# Altium PCB 4CH_Scanner_Board.PcbDoc
Units mm, origin at the board's own origin, x right, y up, seen from the top; angles counter-clockwise.
Board outline 160 x 100 mm, 4 copper layers (Top Layer, Inner Layer 1, Inner Layer 2, Bottom Layer), stack 1.654 mm thick; 74 components, 88 nets, 358 pads, 1659 vias.
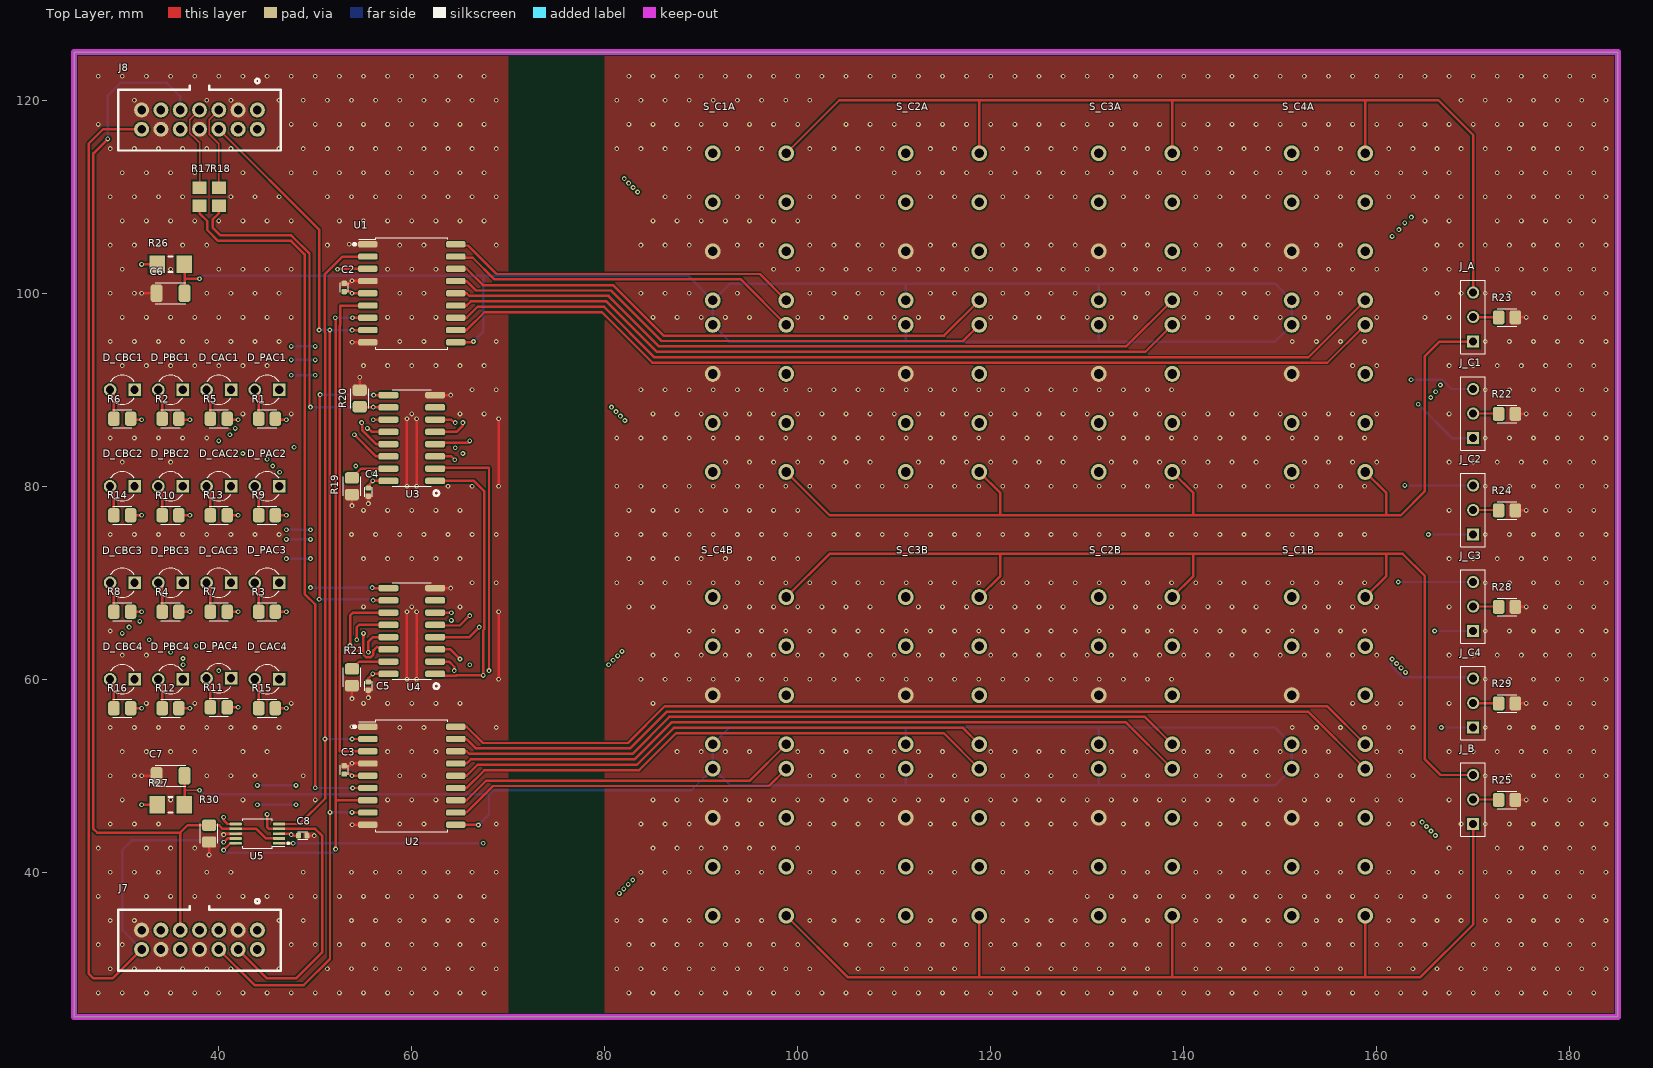
[diagram p0: Top Layer view]
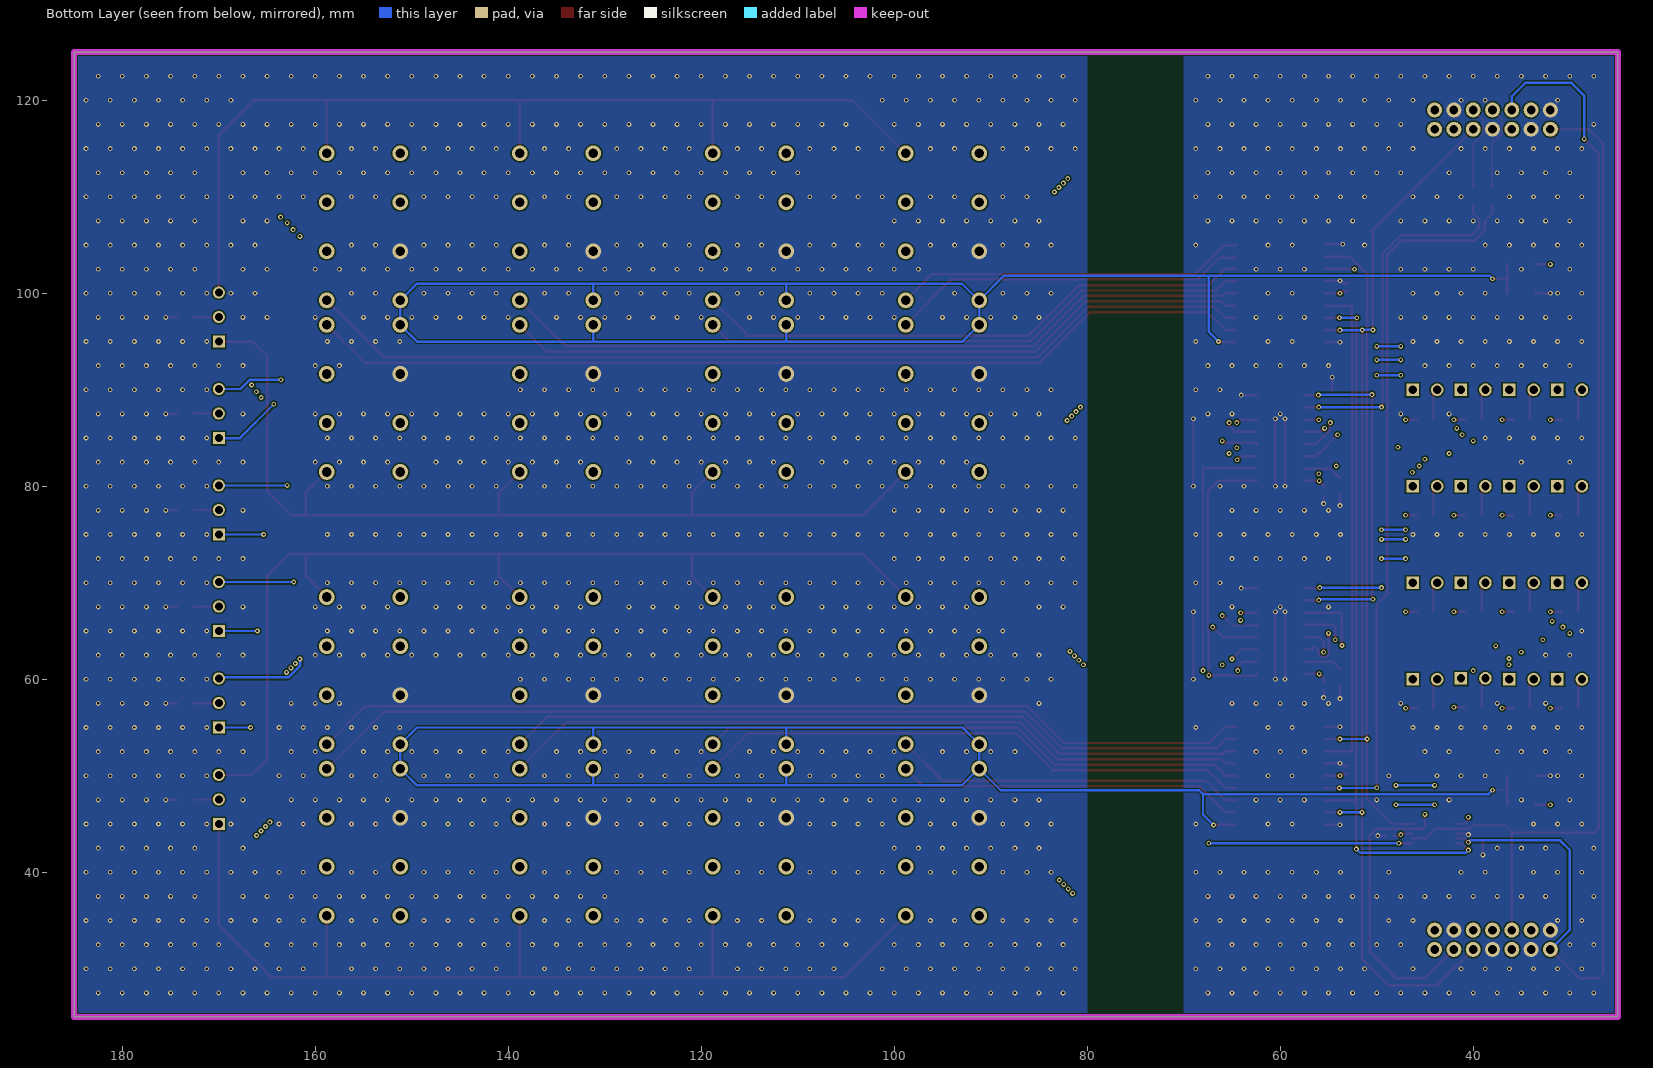
[diagram p1: Bottom Layer view, seen from below]
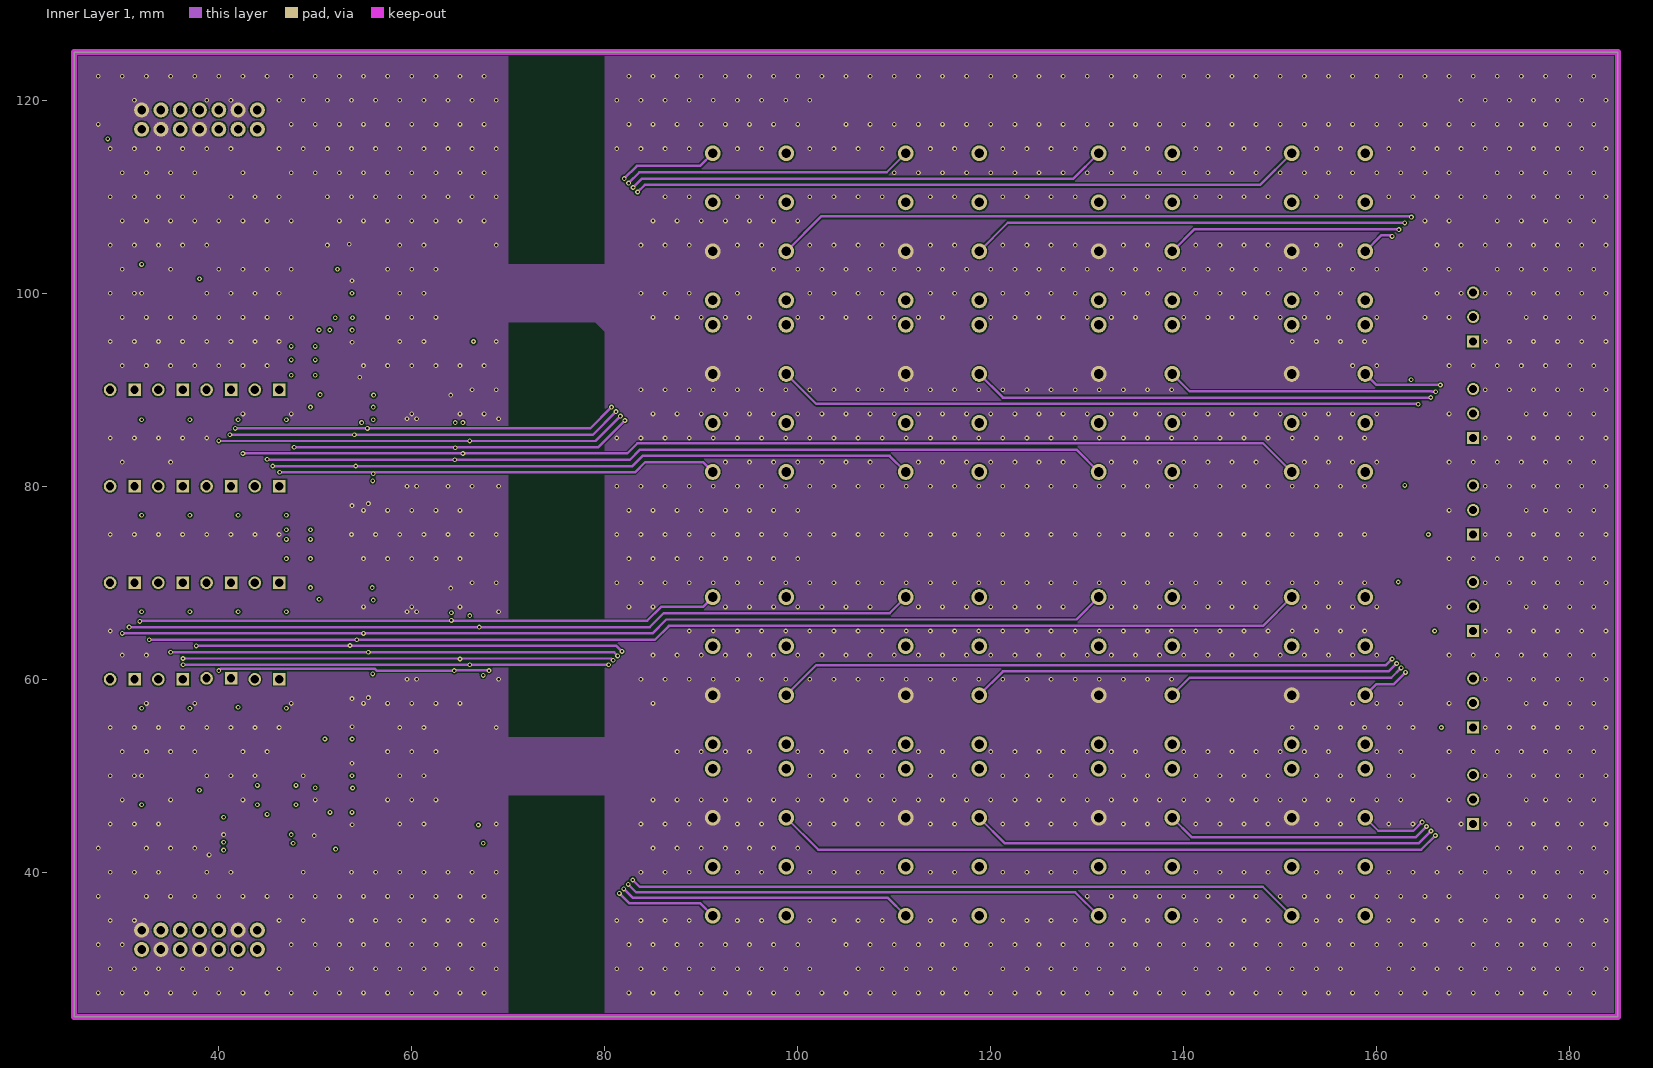
[diagram p2: Inner Layer 1]
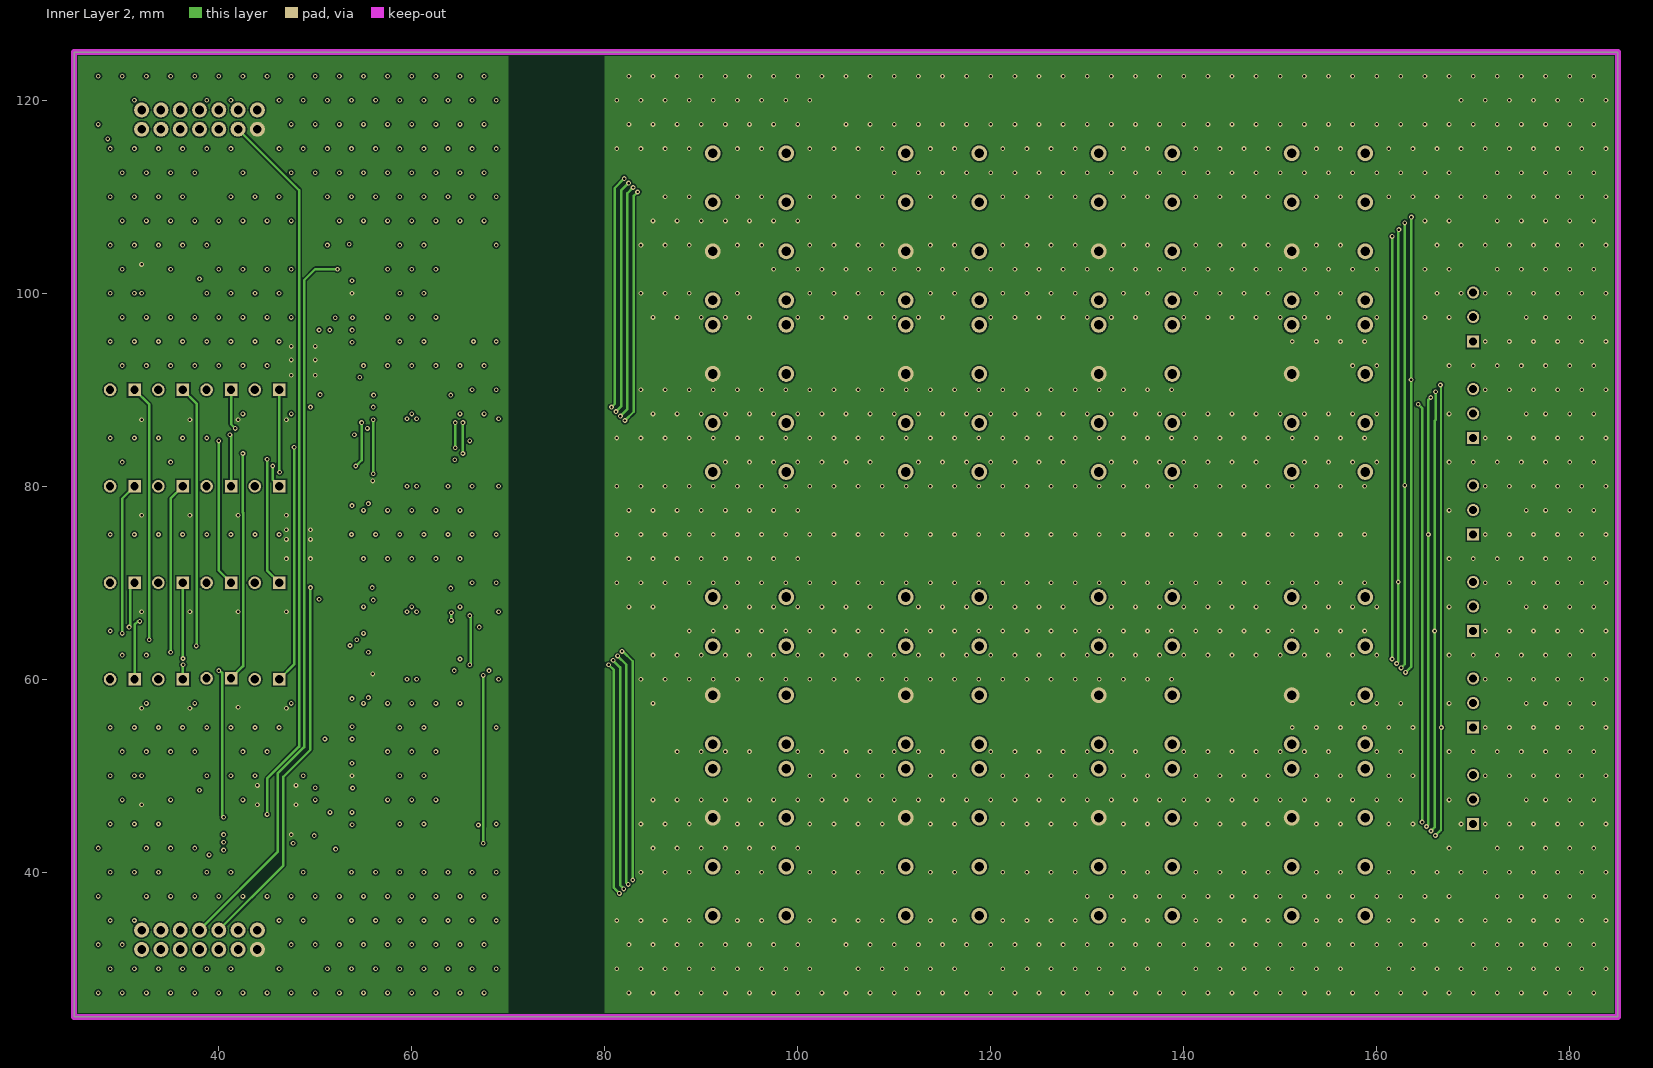
[diagram p3: Inner Layer 2]
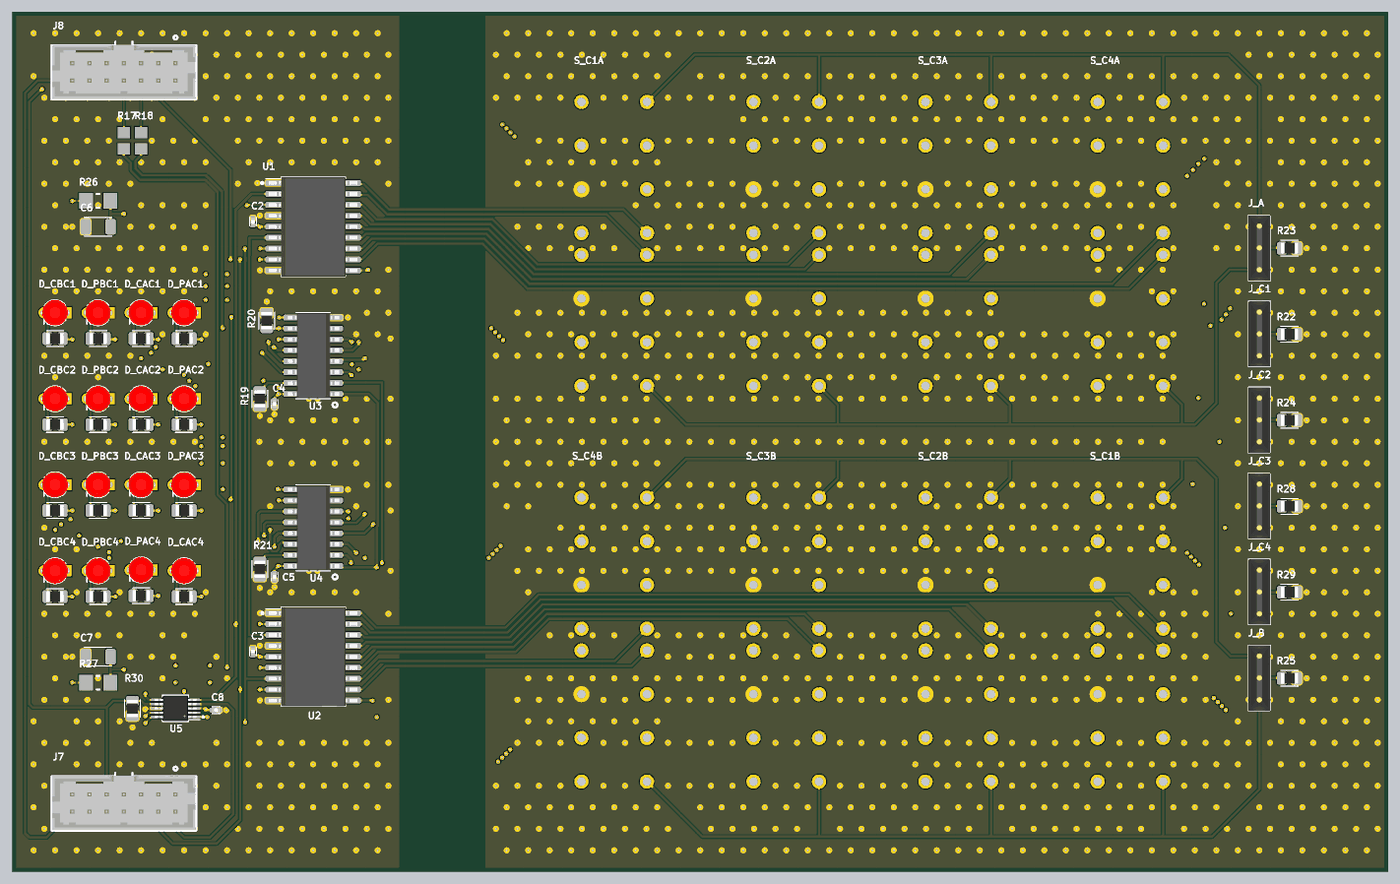
[diagram p4: 3D render of the assembled board from above, using the file's embedded part models]

## Layer stack, top to bottom
Top Solder: solder mask 0.0102, Solder Resist, Dk 3.5
Top Layer: signal copper 0.042
Dielectric 1: prepreg 0.2, FR-4, Dk 4.2
Inner Layer 1: signal copper 0.035
Dielectric 2: core 1.1, FR-4, Dk 4.2
Inner Layer 2: signal copper 0.035
Dielectric 3: prepreg 0.2, FR-4, Dk 4.2
Bottom Layer: signal copper 0.042
Bottom Solder: solder mask 0.0102, Solder Resist, Dk 3.5

## Board outline
25,25 185,25 185,125 25,125

## Design rules (kind name [scope] priority, off if disabled: settings)
Clearance [All] p1: gap=0.15
MinimumSolderMaskSliver [All] p1: minsoldermaskwidth=0.1
PlaneClearance [All] p1: clearance=0.3
PlaneConnect PlaneConnect_1 [All] p1: planeconnectstyle=Relief reliefexpansion=0.508 reliefentries=4 reliefconductorwidth=0.254 reliefairgap=0.254
PolygonConnect PolygonConnect_1 [All] p1: connectstyle=Direct reliefconductorwidth=0.254 reliefentries=4 polygonreliefangle="90 Angle" airgapwidth=0.254
RoutingVias [All] p1: holewidth=0.25 width=0.5 viastyle="Through Hole" minholewidth=0.2 minwidth=0.4 maxholewidth=1 maxwidth=1.27
SilkToSolderMaskClearance [IsPad] p1: minsilkscreentomaskgap=0.1 clearancetoexposedcopper=TRUE
SolderMaskExpansion [All] p1: expansion=0.102
Width [All] p1: maxlimit=2 minlimit=0.15 preferedwidth=0.254
26 further rules are at their usual default settings.

## Components (designator, comment, footprint, x,y, rotation, side; value= is the part's Value field where it differs from the comment)
C2 "0.1µF" CAPC1005X55L25N 53,100.6 r90 top
C3 "0.1µF" CAPC1005X55L25N 53,50.6 r90 top
C4 "0.1µF" CAPC1005X55L25N 55.5,79.4 r270 top
C5 "0.1µF" CAPC1005X55L25N 55.5,59.3 r270 top
C6 "10µF" CAPC3216X160L55N 35,100 r180 top
C7 "10µF" CAPC3216X160L55N 35,50 r180 top
C8 "0.1µF" CAPC1005X55L25N 48.7,43.8 r0 top
D_CAC1 "Red LED" LEDRD100W25D118H196 40,90 r180 top
D_CAC2 "Red LED" LEDRD100W25D118H196 40,80 r180 top
D_CAC3 "Red LED" LEDRD100W25D118H196 40,70 r180 top
D_CAC4 "Red LED" LEDRD100W25D118H196 45,60 r180 top
D_CBC1 "Red LED" LEDRD100W25D118H196 30,90 r180 top
D_CBC2 "Red LED" LEDRD100W25D118H196 30,80 r180 top
D_CBC3 "Red LED" LEDRD100W25D118H196 30,70 r180 top
D_CBC4 "Red LED" LEDRD100W25D118H196 30,60 r180 top
D_PAC1 "Red LED" LEDRD100W25D118H196 45,90 r180 top
D_PAC2 "Red LED" LEDRD100W25D118H196 45,80 r180 top
D_PAC3 "Red LED" LEDRD100W25D118H196 45,70 r180 top
D_PAC4 "Red LED" LEDRD100W25D118H196 40,60.1 r180 top
D_PBC1 "Red LED" LEDRD100W25D118H196 35,90 r180 top
D_PBC2 "Red LED" LEDRD100W25D118H196 35,80 r180 top
D_PBC3 "Red LED" LEDRD100W25D118H196 35,70 r180 top
D_PBC4 "Red LED" LEDRD100W25D118H196 35,60 r180 top
J7 "QUIKEVAL_HEADER" 0878311420 38,33 r0 top
J8 "QUIKEVAL_HEADER" 0878311420 38,118 r0 top
J_A "1PR 22AWG STP" HDRV3W25P100_3X1_300X100H500 170,95 r90 top
J_B "1PR 22AWG STP" HDRV3W25P100_3X1_300X100H500 170,45 r90 top
J_C1 "1PR 22AWG STP" HDRV3W25P100_3X1_300X100H500 170,85 r90 top
J_C2 "1PR 22AWG STP" HDRV3W25P100_3X1_300X100H500 170,75 r90 top
J_C3 "1PR 22AWG STP" HDRV3W25P100_3X1_300X100H500 170,65 r90 top
J_C4 "1PR 22AWG STP" HDRV3W25P100_3X1_300X100H500 170,55 r90 top
R1 "1k" RESC2012X75L55N 45,87 r0 top
R2 "1k" RESC2012X75L55N 35,87 r0 top
R3 "1k" RESC2012X75L55N 45,67 r0 top
R4 "1k" RESC2012X75L55N 35,67 r0 top
R5 "1k" RESC2012X75L55N 40,87 r0 top
R6 "1k" RESC2012X75L55N 30,87 r0 top
R7 "1k" RESC2012X75L55N 40,67 r0 top
R8 "1k" RESC2012X75L55N 30,67 r0 top
R9 "1k" RESC2012X75L55N 45,77 r0 top
R10 "1k" RESC2012X75L55N 35,77 r0 top
R11 "1k" RESC2012X75L55N 40,57.1 r0 top
R12 "1k" RESC2012X75L55N 35,57 r0 top
R13 "1k" RESC2012X75L55N 40,77 r0 top
R14 "1k" RESC2012X75L55N 30,77 r0 top
R15 "1k" RESC2012X75L55N 45,57 r0 top
R16 "1k" RESC2012X75L55N 30,57 r0 top
R17 "Jumper" RESC_2012[0805]_N 38,110 r270 top
R18 "Jumper" RESC_2012[0805]_N 40,110 r270 top
R19 "10k" RESC2012X75L55N 53.8,80 r90 top
R20 "10k" RESC2012X75L55N 54.6,89.1 r270 top
R21 "10k" RESC2012X75L55N 53.8,60.2 r90 top
R22 "0.0" RESC2012X75L55N 173.5,87.5 r0 top
R23 "0.0" RESC2012X75L55N 173.5,97.5 r0 top
R24 "0.0" RESC2012X75L55N 173.5,77.5 r0 top
R25 "0.0" RESC2012X75L55N 173.5,47.5 r0 top
R26 "10k" RESC_3216[1206]_N 35,103 r0 top
R27 "10k" RESC_3216[1206]_N 35,47 r0 top
R28 "0.0" RESC2012X75L55N 173.5,67.5 r0 top
R29 "0.0" RESC2012X75L55N 173.5,57.5 r0 top
R30 "10k" RESC2012X75L55N 39,44 r90 top
S_C1A "4PDT_RELAY_L2" L2_4PDT_RELAY 95,98 r90 top
S_C1B "4PDT_RELAY_L2" L2_4PDT_RELAY 155,52 r90 top
S_C2A "4PDT_RELAY_L2" L2_4PDT_RELAY 115,98 r90 top
S_C2B "4PDT_RELAY_L2" L2_4PDT_RELAY 135,52 r90 top
S_C3A "4PDT_RELAY_L2" L2_4PDT_RELAY 135,98 r90 top
S_C3B "4PDT_RELAY_L2" L2_4PDT_RELAY 115,52 r90 top
S_C4A "4PDT_RELAY_L2" L2_4PDT_RELAY 155,98 r90 top
S_C4B "4PDT_RELAY_L2" L2_4PDT_RELAY 95,52 r90 top
U1 "MIC5842" SOIC18P127_1155X1030X265L83X41N 60,100 r270 top
U2 "MIC5842" SOIC18P127_1155X1030X265L83X41N 60,50 r270 top
U3 "74HC165" SOIC16P127_990X600X175L83X41N 60,85 r90 top
U4 "74HC165" SOIC16P127_990X600X175L83X41N 60,65 r90 top
U5 "FSA2257MUX" SOP50P490X110-10L30N 44,44 r90 top

## Footprints (in the part's own frame and the unit in brackets; to place one, negate y for a bottom-side part, rotate by r counter-clockwise, add the part's x,y. Pads: shape width x height; smd on the part's side, far side on the other; paste and mask are expansions set on the pad)
0878311420 [mm]
  round 1.55 hole 0.9: 1(6,1) 2(6,-1) 3(4,1) 4(4,-1) 5(2,1) 6(2,-1) 7(0,1) 8(0,-1) 9(-2,1) 10(-2,-1) 11(-4,1) 12(-4,-1) 13(-6,1) 14(-6,-1)
  silkscreen extent -8.4,-3.2 8.4,4.22, body extent -8.33,-3.15 8.33,3.15, height 4.9
CAPC1005X55L25N [mm] "Capacitor, Chip; 1.00 mm L X 0.50 mm W X 0.55 mm H body"
  rrect52% 0.54x0.6 smd: 1(-0.43,0) 2(0.43,0)
  silkscreen extent -0.5,-0.4 0.5,0.4, body extent -0.5,-0.26 0.5,0.26, height 0.57
CAPC3216X160L55N [mm] "Capacitor, Chip; 3.20 mm L X 1.60 mm W X 1.60 mm H body"
  rrect41% 1.21x1.82 smd: 1(-1.45,0) 2(1.45,0)
  silkscreen extent -1.6,-1.09 1.6,1.09
HDRV3W25P100_3X1_300X100H500 [mm] "Header, Vertical, 100 mil pitch; 25 mil lead width, 3 pins, 1 row, 3 pins per row, 300 mil L X 100 mil W X 500 mil H body"
  rect 1.25x1.25 hole 0.833 paste-1.25: 1(0,0)
  round 1.25 hole 0.833 paste-1.25: 2(2.54,0) 3(5.08,0)
  silkscreen extent -1.27,-1.27 6.35,1.27, body extent -1.27,-1.27 6.35,1.27, height 12.7
L2_4PDT_RELAY [mil]
  round 65 hole 40: 1(50,150) 2(-50,150) 3(250,150) 4(-250,150) 5(450,150) 6(-450,150) 7(650,150) 8(-650,150) 9(-650,-150) 10(650,-150) 11(-450,-150) 12(450,-150) 13(-250,-150) 14(250,-150) 15(-50,-150)
  round 65 hole 40 paste+0: 16(50,-150)
  body extent -795,-195 795,195, height 390
LEDRD100W25D118H196 [mil] "Radial (LED); 100 mil C X 118.1 mil Dia X 196.9 mil H body"
  round 51.2 hole 34 paste-51.2: A(50,0)
  rect 51.2x51.2 hole 34 paste-51.2: C(-50,0)
  silkscreen extent -49,-59 49,59, body extent -63,-59 63,59, height 197
RESC2012X75L55N [mm] "Resistor, Chip; 2.00 mm L X 1.25 mm W X 0.75 mm H body"
  rrect42% 1.19x1.47 smd: 1(-0.865,0) 2(0.865,0)
  silkscreen extent -1,-0.91 1,0.91, body extent -1,-0.62 1,0.63, height 0.6
RESC_2012[0805]_N [mm] "Resistor EIA 0805"
  rect 1.3x1.45 smd: 1(-0.95,0) 2(0.95,0)
  body extent -1.08,-0.7 1.07,0.7, height 0.65
RESC_3216[1206]_N [mm] "Resistor EIA 1206"
  rect 1.6x1.8 smd: 1(-1.4,0) 2(1.4,0)
  silkscreen extent -0.2,-0.8 0.2,0.8, body extent -1.68,-0.87 1.68,0.87, height 0.71
SOIC16P127_990X600X175L83X41N [mm] "Small Outline IC (SOIC), 1.27 mm pitch; 16 pin, 9.90 mm L X 3.90 mm W X 1.75 mm H body"
  rrect52% 0.66x2.07 smd: 1(-4.445,-2.425) 2(-3.175,-2.425) 3(-1.905,-2.425) 4(-0.635,-2.425) 5(0.635,-2.425) 6(1.905,-2.425) 7(3.175,-2.425) 8(4.445,-2.425) 9(4.445,2.425) 10(3.175,2.425) 11(1.905,2.425) 12(0.635,2.425) 13(-0.635,2.425) 14(-1.905,2.425) 15(-3.175,2.425) 16(-4.445,2.425)
  silkscreen extent -6,-2.82 5,2, body extent -4.95,-3.05 4.95,2.95, height 1.75
SOIC18P127_1155X1030X265L83X41N [mm] "Small Outline IC (SOIC), 1.27 mm pitch; 18 pin, 11.55 mm L X 7.50 mm W X 2.65 mm H body"
  rrect52% 0.66x2 smd: 1(-5.08,-4.555) 2(-3.81,-4.555) 3(-2.54,-4.555) 4(-1.27,-4.555) 5(0,-4.555) 6(1.27,-4.555) 7(2.54,-4.555) 8(3.81,-4.555) 9(5.08,-4.555) 10(5.08,4.555) 11(3.81,4.555) 12(2.54,4.555) 13(1.27,4.555) 14(0,4.555) 15(-1.27,4.555) 16(-2.54,4.555) 17(-3.81,4.555) 18(-5.08,4.555)
  silkscreen extent -5.78,-6.05 5.78,3.75, body extent -5.77,-5.15 5.77,5.15, height 2.65
SOP50P490X110-10L30N [mm] "Small Outline Pkg (SOP), 0.50 mm pitch; 10 pin, 3.00 mm L X 3.00 mm W X 1.10 mm H body"
  rrect50% 0.28x1.27 smd: 1(-1,-2.25) 2(-0.5,-2.25) 3(0,-2.25) 4(0.5,-2.25) 5(1,-2.25) 6(1,2.25) 7(0.5,2.25) 8(0,2.25) 9(-0.5,2.25) 10(-1,2.25)
  silkscreen extent -1.53,-3.3 1.53,1.53, body extent -1.5,-2.45 1.5,2.45, height 1.15

## Part data
C2 C3 C4 C5 C8: library part GRM155R71C104JA88D, "CAP CER 0.1UF 16V X7R 0402"
C6 C7: library part GRM31CR71E106KA12L, "CAP CER 10UF 25V X7R 1206"
D_CAC1 D_CAC2 D_CAC3 D_CAC4 D_CBC1 D_CBC2 D_CBC3 D_CBC4 D_PAC1 D_PAC2 D_PAC3 D_PAC4 D_PBC1 D_PBC2 D_PBC3 D_PBC4: library part SSI-LXH600ID-150, "LED 5MM RED DIFF 6\"LDS PANEL MT"
J7 J8: library part 0878311420, "CONN HEADER 14POS 2MM VERT GOLD"
J_A J_B J_C1 J_C2 J_C3 J_C4: library part CON-STP-22AWG-x3, "SOLDER HOLES FOR 3 22AWG WIRES"
R1 R2 R3 R4 R5 R6 R7 R8 R9 R10 R11 R12 R13 R14 R15 R16: library part ERJ-P06J102V, "RES SMD 1K OHM 5% 1/2W 0805"
R17 R18: library part WSL0805R0500FEA18, "RES SMD 0.05 OHM 1% 1/4W 0805"
R19 R20 R21 R30: library part ERJ-P06J103V, "RES SMD 10K OHM 5% 1/2W 0805"
R22 R23 R24 R25 R28 R29: library part ERJ-6BWFR030V, "RES SMD 0.03 OHM 1% 1/2W 0805"
R26 R27: library part CRCW120610K0JNEA, "RES SMD 10K OHM 5% 1/4W 1206"
S_C1A S_C1B S_C2A S_C2B S_C3A S_C3B S_C4A S_C4B: library part DS4E-ML2-DC5V, "RELAY GENERAL PURPOSE 4PDT 2A 5V"
U1 U2: library part MIC5842YWM, "IC DRVR LATCH 8BIT SER IN 18SOIC"
U3 U4: library part 74HC165D, "IC 8BIT SHIFT REGISTER 16SOIC"
U5: "IC SWITCH DUAL SPDT 10MSOP"

## Via types
v1: diameter 0.5, hole 0.25, Top Layer to Bottom Layer, 1659 vias

## Nets (pads, with @x,y where several pads share a name; then routed paths per layer and width w, separated by ;. In a path a pad name is that pad's centre, name@x,y a point inside that pad or via, vN(x,y) a via of type N, cw(c..) or ccw(c..) an arc to the next point about the centre after c; other vN are vias at no path point)
165_CLK: U3.2 U4.2 U5.6 | length 74.5
  Top Layer w0.254: v1(40.5,45.7) 40.5,45.4 40.9,45 U5.6 ; U4.2 63.869,61.825 64.4,61.294 v1(64.4,60.9) ; U3.2@62.5,81.9 68,81.9 v1(68,60.9)
  Inner Layer 1 w0.254: v1(40,60.9) 40.182,61.082 56.173,61.082 56.355,60.9 v1(64.4,60.9) 64.427,60.927 v1@67.973,60.927
  Inner Layer 2 w0.254: v1(40,60.9) 40.1,60.9 40.343,60.657 40.343,45.857 v1(40.5,45.7)
  Bottom Layer w0.254: v1(64.4,60.9) v1@64.5,61
165_QH: U3.9 U4.10 | length 35.6
  Top Layer w0.254: v1(50.4,68.3) 50.482,68.3 v1@50.482,89.482 ; v1@56.025,68.175 U4.10 ; v1(56.045,89.445) U3.9
  Bottom Layer w0.254: v1(50.4,68.3) 55.9,68.3 v1(56,68.2) ; v1(50.5,89.5) 55.99,89.5 v1(56.045,89.445)
A_PWR: C6.1 R26.2 S_C1A.1 S_C1A.2 S_C2A.1 S_C2A.2 S_C3A.1 S_C3A.2 S_C4A.1 S_C4A.2 U1.10 | length 202.7
  Top Layer w0.254: C6.1 36.45,101.5 ; R26.2@36.45,102.95 36.45,101.5 ; v1(38,101.5) 36.45,101.5 ; U1.10 66.32,94.92 v1(66.4,95)
  Bottom Layer w0.254: v1(38,101.5) 38.327,101.827 67.4,101.827 ; v1(66.4,95) 67.4,96 67.4,101.827 ; S_C1A.1@91,99 S_C1A.1@91.19,99.19 ; 111.19,95.19 S_C2A.2 ; S_C2A.1 111.19,100.81 ; S_C3A.2@131,96.54 S_C3A.2 131.19,95.19 ; S_C3A.1 131.19,100.81 ; 67.4,101.827 88.633,101.827 S_C1A.1 S_C1A.1@91.19,99.19 ; S_C1A.1@91.19,99.19 93,101 149.46,101 S_C4A.1 S_C4A.2 149.46,95 92.92,95 S_C1A.2 S_C1A.1@91.19,99.19
AUX: J7.14 J8.14 U5.9 | length 122.6
  Top Layer w0.254: J7.14 29,29 27,29 26.5,29.5 26.5,115.5 28,117 J8.14 ; v1(40.5,43.1) 40.9,43.5 U5.9
  Bottom Layer w0.254: J7.14 30,34 30,42.3 31,43.3 40.3,43.3 v1(40.5,43.1)
B_PWR: C7.1 R27.2 S_C1B.1 S_C1B.2 S_C2B.1 S_C2B.2 S_C3B.1 S_C3B.2 S_C4B.1 S_C4B.2 U2.10 | length 199.4
  Top Layer w0.15: 36.45,48.5 v1(38,48.5)
  Top Layer w0.254: R27.2 36.45,47.05 36.45,48.5 C7.1 ; U2.10 v1@66.88,44.92
  Bottom Layer w0.254: v1(38,48.5) 38.4,48.1 68,48.1 ; v1(66.9,44.9) 68,46 68,48.1 ; S_C4B.2@91,51 S_C4B.2@91.19,50.81 ; 111.19,49.19 S_C3B.2 ; S_C3B.1 111.19,54.81 ; 131.19,49.19 S_C2B.2 ; S_C2B.1 131.19,54.81 ; 68,48.1 68.4,48.5 88.96,48.5 S_C4B.2 S_C4B.2@91.19,50.81 ; S_C4B.2@91.19,50.81 93,49 149.46,49 S_C1B.2 S_C1B.1 149.46,55 92.92,55 S_C4B.1 S_C4B.2@91.19,50.81
COM_A: J_A.3 S_C1A.10 S_C2A.10 S_C3A.10 S_C4A.10 | length 107.6
  Top Layer w0.254: S_C1A.10 104.3,120 166.4,120 170,116.4 J_A.3 ; S_C2A.10 118.81,119.99 ; S_C3A.10 138.81,119.99 ; S_C4A.10 158.81,119.91
COM_B: J_B.3 S_C1B.10 S_C2B.10 S_C3B.10 S_C4B.10 | length 109.9
  Top Layer w0.254: S_C4B.10 103.3,73 121,73 ; S_C3B.10 121,70.7 121,73 ; S_C2B.10 141,70.7 141,73 ; S_C1B.10 161,70.7 161,73 ; J_B.3 166.62,50.08 165,51.7 165,70.7 162.7,73 161,73 ; 121,73 141,73 ; 141,73 161,73
CON_A_CELL1: S_C1A.16 U1.18 | length 36.7
  Top Layer w0.254: U1.18 64.682,104.953 65.845,104.953 68.798,102 96.08,102 S_C1A.16
CON_A_CELL2: S_C2A.16 U1.16 | length 58.6
  Top Layer w0.254: U1.16 65.682,102.54 67.367,100.855 80.868,100.855 86.103,95.62 115.16,95.62 S_C2A.16
CON_A_CELL3: S_C3A.16 U1.14 | length 78.5
  Top Layer w0.254: U1.14 65.682,100 65.955,99.727 80.401,99.727 85.636,94.492 134.032,94.492 S_C3A.16
CON_A_CELL4: S_C4A.16 U1.12 | length 99.3
  Top Layer w0.254: U1.12 65.682,97.46 66.821,98.599 79.934,98.599 85.169,93.364 152.904,93.364 S_C4A.16
CON_B_CELL1: S_C1B.16 U2.18 | length 98.2
  Top Layer w0.254: U2.18 65.682,55.08 67.367,53.395 82.395,53.395 86.22,57.22 154.86,57.22 S_C1B.16
CON_B_CELL2: S_C2B.16 U2.16 | length 77.1
  Top Layer w0.254: U2.16 65.682,52.54 65.955,52.267 82.862,52.267 86.687,56.092 135.988,56.092 S_C2B.16
CON_B_CELL3: S_C3B.16 U2.14 | length 57
  Top Layer w0.254: U2.14 65.682,50 66.821,51.139 83.329,51.139 87.154,54.964 117.116,54.964 S_C3B.16
CON_B_CELL4: S_C4B.16 U2.12 | length 36.7
  Top Layer w0.254: U2.12 65.682,47.46 67.722,49.5 95.04,49.5 S_C4B.16
CSN: J7.6 J8.6 U1.8 U2.8 | length 113.7
  Top Layer w0.254: J7.6 43.7,28.3 48.8,28.3 51.523,31.023 v1(51.523,46.2) 51.523,54.051 51.5,54.073 v1(51.5,96.2) ; J8.6 50.4,106.6 v1(50.4,96.2) ; v1(53.8,46.2) 53.81,46.19 U2.8 ; v1(53.81,96.19) U1.8 U1.8@55.335,96.3
  Bottom Layer w0.254: v1(50.4,96.2) v1@51.6,96.2 ; v1(51.5,96.2) 51.52,96.2 51.51,96.19 v1(53.81,96.19) ; v1(51.523,46.2) v1(53.8,46.2)
GND: C2.2 C3.2 C4.2 C5.2 C6.2 C7.2 C8.2 J7.3 J7.8 J7.12 J7.13 J8.3 J8.8 J8.12 J8.13 R19.1 R20.1 R21.1 R22.2 R23.2 R24.2 R25.2 R28.2 R29.2 R30.1 S_C1A.3 S_C1A.4 S_C1B.3 S_C1B.4 S_C2A.3 S_C2A.4 S_C2B.3 S_C2B.4 S_C3A.3 S_C3A.4 S_C3B.3 S_C3B.4 S_C4A.3 S_C4A.4 S_C4B.3 S_C4B.4 U1.1 U1.4 U1.9 U2.1 U2.4 U2.9 U3.8 U4.8 U5.8 | length 76.2
  Top Layer w0.254: v1(32,50) C7.2 ; v1(32,100) C6.2@33.6,100 ; v1(39,41.8) R30.1 ; v1(40.5,43.9) 40.6,44 U5.8 ; C8.2 v1(49.9,43.8) ; C3.2@52.925,51.055 53.555,51.055 v1(53.8,51.3) 55.415,51.3 U2.4 U2.4@55.425,51.25 ; C2.2@52.925,101.055 53.555,101.055 v1(53.8,101.3) U1.4@55.415,101.3 ; v1(53.52,105.08) U1.1 ; v1(53.8,58) R21.1 ; v1(53.8,78) R19.1 ; v1(53.82,44.92) U2.9 ; v1(53.82,55.08) U2.1 ; v1(53.82,94.92) U1.9 ; R20.1 v1(54.6,91.3) ; v1(55.5,58.1) C5.2 ; v1(55.5,78.2) C4.2 ; v1(59.5,60) v1(59.5,67) ; v1(59.5,80) v1(59.5,87) ; v1(60.5,60) v1(60.5,67) ; v1(60.5,80) v1(60.5,87) ; U4.8 v1(64.045,69.445) ; U3.8 v1(64.045,89.445) ; v1(69,60) v1(69,67) ; v1(69,80) v1(69,87) ; R25.2 v1(175.5,47.5) ; R29.2 v1(175.5,57.5) ; R28.2 v1(175.5,67.5) ; R24.2 v1(175.5,77.5) ; R22.2 v1(175.5,87.5) ; R23.2 v1(175.5,97.5)
  Bottom Layer w0.254: v1@53.7,57.9 v1(53.8,58) ; v1@53.8,55.1 v1(53.82,55.08)
  other v1: 27.5,27.5 30,27.5 32.5,27.5 35,27.5 37.5,27.5 40,27.5 42.5,27.5 45,27.5 47.5,27.5 50,27.5 52.5,27.5 55,27.5 57.5,27.5 60,27.5 62.5,27.5 65,27.5 67.5,27.5 82.5,27.5 85,27.5 87.5,27.5 90,27.5 92.5,27.5 95,27.5 97.5,27.5 100,27.5 102.5,27.5 105,27.5 107.5,27.5 110,27.5 112.5,27.5 115,27.5 117.5,27.5 120,27.5 122.5,27.5 125,27.5 127.5,27.5 130,27.5 132.5,27.5 135,27.5 137.5,27.5 140,27.5 142.5,27.5 145,27.5 147.5,27.5 150,27.5 152.5,27.5 155,27.5 157.5,27.5 160,27.5 162.5,27.5 165,27.5 167.5,27.5 170,27.5 172.5,27.5 175,27.5 177.5,27.5 180,27.5 182.5,27.5 28.75,30 31.25,30 33.75,30 36.25,30 38.75,30 41.25,30 46.25,30 51.25,30 53.75,30 56.25,30 58.75,30 61.25,30 63.75,30 66.25,30 68.75,30 81.25,30 83.75,30 86.25,30 88.75,30 91.25,30 93.75,30 96.25,30 98.75,30 101.25,30 106.25,30 108.75,30 111.25,30 113.75,30 116.25,30 121.25,30 123.75,30 126.25,30 128.75,30 131.25,30 133.75,30 136.25,30 141.25,30 143.75,30 146.25,30 148.75,30 151.25,30 153.75,30 156.25,30 161.25,30 163.75,30 166.25,30 168.75,30 171.25,30 173.75,30 176.25,30 178.75,30 181.25,30 183.75,30 27.5,32.5 30,32.5 47.5,32.5 50,32.5 52.5,32.5 55,32.5 57.5,32.5 60,32.5 62.5,32.5 65,32.5 67.5,32.5 82.5,32.5 85,32.5 87.5,32.5 90,32.5 92.5,32.5 95,32.5 97.5,32.5 100,32.5 105,32.5 107.5,32.5 110,32.5 112.5,32.5 115,32.5 117.5,32.5 120,32.5 122.5,32.5 125,32.5 127.5,32.5 130,32.5 132.5,32.5 135,32.5 137.5,32.5 140,32.5 142.5,32.5 145,32.5 147.5,32.5 150,32.5 152.5,32.5 155,32.5 157.5,32.5 160,32.5 162.5,32.5 165,32.5 170,32.5 172.5,32.5 175,32.5 177.5,32.5 180,32.5 182.5,32.5 28.75,35 31.25,35 46.25,35 48.75,35 53.75,35 56.25,35 58.75,35 61.25,35 63.75,35 66.25,35 68.75,35 81.25,35 83.75,35 86.25,35 88.75,35 93.75,35 96.25,35 101.25,35 103.75,35 106.25,35 108.75,35 113.75,35 116.25,35 121.25,35 123.75,35 126.25,35 128.75,35 133.75,35 136.25,35 141.25,35 143.75,35 146.25,35 148.75,35 153.75,35 156.25,35 161.25,35 163.75,35 166.25,35 168.75,35 171.25,35 173.75,35 176.25,35 178.75,35 181.25,35 183.75,35 27.5,37.5 32.5,37.5 35,37.5 37.5,37.5 40,37.5 42.5,37.5 45,37.5 47.5,37.5 50,37.5 52.5,37.5 55,37.5 57.5,37.5 60,37.5 62.5,37.5 65,37.5 67.5,37.5 130,37.5 132.5,37.5 135,37.5 137.5,37.5 140,37.5 142.5,37.5 145,37.5 147.5,37.5 150,37.5 152.5,37.5 155,37.5 157.5,37.5 160,37.5 162.5,37.5 165,37.5 167.5,37.5 172.5,37.5 175,37.5 177.5,37.5 180,37.5 182.5,37.5 28.75,40 31.25,40 33.75,40 38.75,40 41.25,40 48.75,40 53.75,40 56.25,40 58.75,40 61.25,40 63.75,40 66.25,40 68.75,40 83.75,40 86.25,40 88.75,40 93.75,40 96.25,40 101.25,40 103.75,40 106.25,40 108.75,40 113.75,40 116.25,40 121.25,40 123.75,40 126.25,40 128.75,40 133.75,40 136.25,40 141.25,40 143.75,40 146.25,40 148.75,40 153.75,40 156.25,40 161.25,40 163.75,40 166.25,40 168.75,40 171.25,40 173.75,40 176.25,40 178.75,40 181.25,40 183.75,40 27.5,42.5 32.5,42.5 35,42.5 37.5,42.5 85,42.5 87.5,42.5 90,42.5 92.5,42.5 95,42.5 97.5,42.5 100,42.5 167.5,42.5 172.5,42.5 175,42.5 177.5,42.5 180,42.5 182.5,42.5 28.75,45 31.25,45 33.75,45 58.75,45 61.25,45 68.75,45 83.75,45 86.25,45 88.75,45 93.75,45 96.25,45 101.25,45 103.75,45 106.25,45 108.75,45 113.75,45 116.25,45 121.25,45 123.75,45 126.25,45 128.75,45 133.75,45 136.25,45 141.25,45 143.75,45 146.25,45 148.75,45 153.75,45 156.25,45 161.25,45 163.75,45 168.75,45 171.25,45 173.75,45 176.25,45 178.75,45 181.25,45 183.75,45 30,47.5 35,47.5 42.5,47.5 50,47.5 57.5,47.5 60,47.5 62.5,47.5 85,47.5 87.5,47.5 90,47.5 92.5,47.5 95,47.5 97.5,47.5 100,47.5 102.5,47.5 105,47.5 107.5,47.5 110,47.5 112.5,47.5 115,47.5 117.5,47.5 120,47.5 122.5,47.5 125,47.5 127.5,47.5 130,47.5 132.5,47.5 135,47.5 137.5,47.5 140,47.5 142.5,47.5 145,47.5 147.5,47.5 150,47.5 152.5,47.5 155,47.5 157.5,47.5 160,47.5 162.5,47.5 167.5,47.5 177.5,47.5 180,47.5 182.5,47.5 28.75,50 31.25,50 38.75,50 41.25,50 43.75,50 48.75,50 58.75,50 61.25,50 101.25,50 103.75,50 106.25,50 108.75,50 113.75,50 116.25,50 121.25,50 123.75,50 126.25,50 128.75,50 133.75,50 136.25,50 141.25,50 143.75,50 146.25,50 148.75,50 153.75,50 156.25,50 161.25,50 163.75,50 171.25,50 173.75,50 176.25,50 178.75,50 181.25,50 183.75,50 30,52.5 32.5,52.5 35,52.5 37.5,52.5 42.5,52.5 45,52.5 57.5,52.5 60,52.5 62.5,52.5 87.5,52.5 90,52.5 92.5,52.5 95,52.5 100,52.5 102.5,52.5 105,52.5 107.5,52.5 110,52.5 112.5,52.5 115,52.5 120,52.5 122.5,52.5 125,52.5 127.5,52.5 130,52.5 132.5,52.5 135,52.5 140,52.5 142.5,52.5 145,52.5 147.5,52.5 150,52.5 152.5,52.5 155,52.5 160,52.5 162.5,52.5 167.5,52.5 170,52.5 172.5,52.5 175,52.5 177.5,52.5 180,52.5 182.5,52.5 28.75,55 31.25,55 33.75,55 36.25,55 38.75,55 41.25,55 43.75,55 46.25,55 58.75,55 61.25,55 68.75,55 151.25,55 153.75,55 156.25,55 158.75,55 161.25,55 163.75,55 171.25,55 173.75,55 176.25,55 178.75,55 181.25,55 183.75,55 32.5,57.5 37.5,57.5 47.5,57.5 55,57.5 57.5,57.5 60,57.5 62.5,57.5 65,57.5 85,57.5 157.5,57.5 160,57.5 162.5,57.5 167.5,57.5 177.5,57.5 180,57.5 182.5,57.5 83.75,60 86.25,60 88.75,60 91.25,60 93.75,60 96.25,60 98.75,60 101.25,60 103.75,60 106.25,60 108.75,60 111.25,60 113.75,60 116.25,60 118.75,60 121.25,60 123.75,60 126.25,60 128.75,60 131.25,60 133.75,60 136.25,60 138.75,60 171.25,60 173.75,60 176.25,60 178.75,60 181.25,60 183.75,60 30,62.5 32.5,62.5 85,62.5 87.5,62.5 90,62.5 92.5,62.5 95,62.5 97.5,62.5 100,62.5 102.5,62.5 105,62.5 107.5,62.5 110,62.5 112.5,62.5 115,62.5 117.5,62.5 120,62.5 122.5,62.5 125,62.5 127.5,62.5 130,62.5 132.5,62.5 135,62.5 137.5,62.5 140,62.5 142.5,62.5 145,62.5 147.5,62.5 150,62.5 152.5,62.5 155,62.5 157.5,62.5 160,62.5 167.5,62.5 170,62.5 172.5,62.5 175,62.5 177.5,62.5 180,62.5 182.5,62.5 28.75,65 88.75,65 91.25,65 93.75,65 96.25,65 98.75,65 101.25,65 103.75,65 106.25,65 108.75,65 111.25,65 113.75,65 116.25,65 118.75,65 121.25,65 123.75,65 126.25,65 128.75,65 131.25,65 133.75,65 136.25,65 138.75,65 141.25,65 143.75,65 146.25,65 148.75,65 151.25,65 153.75,65 156.25,65 158.75,65 171.25,65 173.75,65 176.25,65 178.75,65 181.25,65 183.75,65 55,67.5 60,67.5 65,67.5 82.5,67.5 85,67.5 92.5,67.5 95,67.5 97.5,67.5 100,67.5 102.5,67.5 105,67.5 107.5,67.5 112.5,67.5 115,67.5 117.5,67.5 120,67.5 122.5,67.5 125,67.5 127.5,67.5 132.5,67.5 135,67.5 137.5,67.5 140,67.5 142.5,67.5 145,67.5 147.5,67.5 152.5,67.5 155,67.5 157.5,67.5 160,67.5 167.5,67.5 177.5,67.5 180,67.5 182.5,67.5 66.25,70 68.75,70 81.25,70 83.75,70 86.25,70 88.75,70 91.25,70 93.75,70 96.25,70 98.75,70 101.25,70 103.75,70 106.25,70 108.75,70 111.25,70 113.75,70 116.25,70 118.75,70 121.25,70 123.75,70 126.25,70 128.75,70 131.25,70 133.75,70 136.25,70 138.75,70 141.25,70 143.75,70 146.25,70 148.75,70 151.25,70 153.75,70 156.25,70 158.75,70 171.25,70 173.75,70 176.25,70 178.75,70 181.25,70 183.75,70 55,72.5 57.5,72.5 60,72.5 62.5,72.5 65,72.5 82.5,72.5 85,72.5 87.5,72.5 90,72.5 92.5,72.5 95,72.5 97.5,72.5 100,72.5 167.5,72.5 170,72.5 172.5,72.5 175,72.5 177.5,72.5 180,72.5 182.5,72.5 28.75,75 31.25,75 33.75,75 36.25,75 38.75,75 41.25,75 43.75,75 46.25,75 53.75,75 56.25,75 58.75,75 61.25,75 63.75,75 66.25,75 68.75,75 81.25,75 83.75,75 86.25,75 88.75,75 91.25,75 93.75,75 96.25,75 98.75,75 101.25,75 103.75,75 106.25,75 108.75,75 111.25,75 113.75,75 116.25,75 118.75,75 121.25,75 123.75,75 126.25,75 128.75,75 131.25,75 133.75,75 136.25,75 138.75,75 141.25,75 143.75,75 146.25,75 148.75,75 151.25,75 153.75,75 156.25,75 158.75,75 171.25,75 173.75,75 176.25,75 178.75,75 181.25,75 183.75,75 55,77.5 57.5,77.5 60,77.5 62.5,77.5 65,77.5 82.5,77.5 85,77.5 87.5,77.5 90,77.5 92.5,77.5 95,77.5 97.5,77.5 100,77.5 167.5,77.5 177.5,77.5 180,77.5 182.5,77.5 63.75,80 66.25,80 81.25,80 83.75,80 86.25,80 88.75,80 91.25,80 93.75,80 96.25,80 98.75,80 101.25,80 103.75,80 106.25,80 108.75,80 111.25,80 113.75,80 116.25,80 118.75,80 121.25,80 123.75,80 126.25,80 128.75,80 131.25,80 133.75,80 136.25,80 138.75,80 141.25,80 143.75,80 146.25,80 148.75,80 151.25,80 153.75,80 156.25,80 158.75,80 171.25,80 173.75,80 176.25,80 178.75,80 181.25,80 183.75,80 30,82.5 35,82.5 92.5,82.5 95,82.5 97.5,82.5 100,82.5 102.5,82.5 105,82.5 107.5,82.5 112.5,82.5 115,82.5 117.5,82.5 120,82.5 122.5,82.5 125,82.5 127.5,82.5 132.5,82.5 135,82.5 137.5,82.5 140,82.5 142.5,82.5 145,82.5 147.5,82.5 152.5,82.5 155,82.5 157.5,82.5 160,82.5 167.5,82.5 170,82.5 172.5,82.5 175,82.5 177.5,82.5 180,82.5 182.5,82.5 28.75,85 31.25,85 33.75,85 36.25,85 38.75,85 81.25,85 83.75,85 86.25,85 88.75,85 91.25,85 93.75,85 96.25,85 98.75,85 101.25,85 103.75,85 106.25,85 108.75,85 111.25,85 113.75,85 116.25,85 118.75,85 121.25,85 123.75,85 126.25,85 128.75,85 131.25,85 133.75,85 136.25,85 138.75,85 141.25,85 143.75,85 146.25,85 148.75,85 151.25,85 153.75,85 156.25,85 158.75,85 171.25,85 173.75,85 176.25,85 178.75,85 181.25,85 183.75,85 42.5,87.5 47.5,87.5 60,87.5 65,87.5 67.5,87.5 85,87.5 87.5,87.5 90,87.5 92.5,87.5 95,87.5 97.5,87.5 100,87.5 102.5,87.5 105,87.5 107.5,87.5 110,87.5 112.5,87.5 115,87.5 117.5,87.5 120,87.5 122.5,87.5 125,87.5 127.5,87.5 130,87.5 132.5,87.5 135,87.5 137.5,87.5 140,87.5 142.5,87.5 145,87.5 147.5,87.5 150,87.5 152.5,87.5 155,87.5 157.5,87.5 160,87.5 167.5,87.5 177.5,87.5 180,87.5 182.5,87.5 66.25,90 68.75,90 83.75,90 86.25,90 88.75,90 91.25,90 93.75,90 96.25,90 98.75,90 101.25,90 103.75,90 106.25,90 108.75,90 111.25,90 113.75,90 116.25,90 118.75,90 121.25,90 123.75,90 126.25,90 128.75,90 131.25,90 133.75,90 136.25,90 138.75,90 171.25,90 173.75,90 176.25,90 178.75,90 181.25,90 183.75,90 30,92.5 32.5,92.5 35,92.5 37.5,92.5 40,92.5 42.5,92.5 45,92.5 55,92.5 57.5,92.5 60,92.5 62.5,92.5 65,92.5 67.5,92.5 157.5,92.5 160,92.5 167.5,92.5 170,92.5 172.5,92.5 175,92.5 177.5,92.5 180,92.5 182.5,92.5 28.75,95 31.25,95 33.75,95 36.25,95 38.75,95 41.25,95 43.75,95 46.25,95 58.75,95 61.25,95 68.75,95 151.25,95 153.75,95 156.25,95 158.75,95 171.25,95 173.75,95 176.25,95 178.75,95 181.25,95 183.75,95 30,97.5 32.5,97.5 35,97.5 37.5,97.5 40,97.5 42.5,97.5 45,97.5 47.5,97.5 57.5,97.5 60,97.5 62.5,97.5 85,97.5 87.5,97.5 90,97.5 92.5,97.5 95,97.5 100,97.5 102.5,97.5 105,97.5 107.5,97.5 110,97.5 112.5,97.5 115,97.5 120,97.5 122.5,97.5 125,97.5 127.5,97.5 130,97.5 132.5,97.5 135,97.5 140,97.5 142.5,97.5 145,97.5 147.5,97.5 150,97.5 152.5,97.5 155,97.5 160,97.5 165,97.5 167.5,97.5 177.5,97.5 180,97.5 182.5,97.5 28.75,100 31.25,100 38.75,100 41.25,100 43.75,100 46.25,100 58.75,100 61.25,100 83.75,100 86.25,100 88.75,100 93.75,100 101.25,100 103.75,100 106.25,100 108.75,100 113.75,100 116.25,100 121.25,100 123.75,100 126.25,100 128.75,100 133.75,100 136.25,100 141.25,100 143.75,100 146.25,100 148.75,100 153.75,100 156.25,100 166.25,100 168.75,100 171.25,100 173.75,100 176.25,100 178.75,100 181.25,100 183.75,100 30,102.5 35,102.5 40,102.5 42.5,102.5 45,102.5 47.5,102.5 57.5,102.5 60,102.5 62.5,102.5 97.5,102.5 100,102.5 102.5,102.5 105,102.5 107.5,102.5 110,102.5 112.5,102.5 115,102.5 117.5,102.5 120,102.5 122.5,102.5 125,102.5 127.5,102.5 130,102.5 132.5,102.5 135,102.5 137.5,102.5 140,102.5 142.5,102.5 145,102.5 147.5,102.5 150,102.5 152.5,102.5 155,102.5 157.5,102.5 160,102.5 165,102.5 167.5,102.5 172.5,102.5 175,102.5 177.5,102.5 180,102.5 182.5,102.5 28.75,105 31.25,105 33.75,105 36.25,105 38.75,105 51.25,105 58.75,105 61.25,105 68.75,105 83.75,105 86.25,105 88.75,105 93.75,105 96.25,105 101.25,105 103.75,105 106.25,105 108.75,105 113.75,105 116.25,105 121.25,105 123.75,105 126.25,105 128.75,105 133.75,105 136.25,105 141.25,105 143.75,105 146.25,105 148.75,105 153.75,105 156.25,105 166.25,105 168.75,105 171.25,105 173.75,105 176.25,105 178.75,105 181.25,105 183.75,105 30,107.5 32.5,107.5 35,107.5 37.5,107.5 40,107.5 42.5,107.5 45,107.5 47.5,107.5 52.5,107.5 55,107.5 57.5,107.5 60,107.5 62.5,107.5 65,107.5 67.5,107.5 85,107.5 87.5,107.5 90,107.5 92.5,107.5 95,107.5 97.5,107.5 100,107.5 165,107.5 167.5,107.5 172.5,107.5 175,107.5 177.5,107.5 180,107.5 182.5,107.5 28.75,110 31.25,110 33.75,110 36.25,110 41.25,110 43.75,110 46.25,110 51.25,110 53.75,110 56.25,110 58.75,110 61.25,110 63.75,110 66.25,110 68.75,110 86.25,110 88.75,110 93.75,110 96.25,110 101.25,110 103.75,110 106.25,110 108.75,110 113.75,110 116.25,110 121.25,110 123.75,110 126.25,110 128.75,110 133.75,110 136.25,110 141.25,110 143.75,110 146.25,110 148.75,110 153.75,110 156.25,110 161.25,110 163.75,110 166.25,110 168.75,110 171.25,110 173.75,110 176.25,110 178.75,110 181.25,110 183.75,110 30,112.5 32.5,112.5 35,112.5 37.5,112.5 42.5,112.5 47.5,112.5 50,112.5 52.5,112.5 55,112.5 57.5,112.5 60,112.5 62.5,112.5 65,112.5 67.5,112.5 110,112.5 112.5,112.5 115,112.5 117.5,112.5 120,112.5 122.5,112.5 125,112.5 127.5,112.5 130,112.5 132.5,112.5 135,112.5 137.5,112.5 140,112.5 142.5,112.5 145,112.5 147.5,112.5 150,112.5 152.5,112.5 155,112.5 157.5,112.5 160,112.5 162.5,112.5 165,112.5 167.5,112.5 172.5,112.5 175,112.5 177.5,112.5 180,112.5 182.5,112.5 28.75,115 31.25,115 33.75,115 36.25,115 38.75,115 41.25,115 46.25,115 48.75,115 51.25,115 53.75,115 56.25,115 58.75,115 61.25,115 63.75,115 66.25,115 68.75,115 81.25,115 83.75,115 86.25,115 88.75,115 93.75,115 96.25,115 101.25,115 103.75,115 106.25,115 108.75,115 113.75,115 116.25,115 121.25,115 123.75,115 126.25,115 128.75,115 133.75,115 136.25,115 141.25,115 143.75,115 146.25,115 148.75,115 153.75,115 156.25,115 161.25,115 163.75,115 166.25,115 168.75,115 171.25,115 173.75,115 176.25,115 178.75,115 181.25,115 183.75,115 27.5,117.5 47.5,117.5 50,117.5 52.5,117.5 55,117.5 57.5,117.5 60,117.5 62.5,117.5 65,117.5 67.5,117.5 82.5,117.5 85,117.5 87.5,117.5 90,117.5 92.5,117.5 95,117.5 97.5,117.5 100,117.5 105,117.5 107.5,117.5 110,117.5 112.5,117.5 115,117.5 117.5,117.5 120,117.5 122.5,117.5 125,117.5 127.5,117.5 130,117.5 132.5,117.5 135,117.5 137.5,117.5 140,117.5 142.5,117.5 145,117.5 147.5,117.5 150,117.5 152.5,117.5 155,117.5 157.5,117.5 160,117.5 162.5,117.5 165,117.5 167.5,117.5 170,117.5 172.5,117.5 175,117.5 177.5,117.5 180,117.5 182.5,117.5 31.25,120 38.75,120 41.25,120 46.25,120 48.75,120 51.25,120 53.75,120 56.25,120 58.75,120 61.25,120 63.75,120 66.25,120 68.75,120 81.25,120 83.75,120 86.25,120 88.75,120 91.25,120 93.75,120 96.25,120 98.75,120 101.25,120 168.75,120 171.25,120 173.75,120 176.25,120 178.75,120 181.25,120 183.75,120 27.5,122.5 30,122.5 32.5,122.5 35,122.5 37.5,122.5 40,122.5 42.5,122.5 45,122.5 47.5,122.5 50,122.5 52.5,122.5 55,122.5 57.5,122.5 60,122.5 62.5,122.5 65,122.5 67.5,122.5 82.5,122.5 85,122.5 87.5,122.5 90,122.5 92.5,122.5 95,122.5 97.5,122.5 100,122.5 102.5,122.5 105,122.5 107.5,122.5 110,122.5 112.5,122.5 115,122.5 117.5,122.5 120,122.5 122.5,122.5 125,122.5 127.5,122.5 130,122.5 132.5,122.5 135,122.5 137.5,122.5 140,122.5 142.5,122.5 145,122.5 147.5,122.5 150,122.5 152.5,122.5 155,122.5 157.5,122.5 160,122.5 162.5,122.5 165,122.5 167.5,122.5 170,122.5 172.5,122.5 175,122.5 177.5,122.5 180,122.5 182.5,122.5
IO_SEL: J7.9 J8.9 R30.2 U5.2 U5.7 | length 117
  Top Layer w0.254: v1(28.5,116) 27,114.5 27,44.5 27.4,44.1 36,44.1 ; J7.9 36,44.1 ; U5.2 44.9,43.5 43.9,44.5 U5.7 40.4,44.5 40.035,44.865 R30.2 36.765,44.865 36,44.1
  Bottom Layer w0.254: v1(28.5,116) 28.5,120.5 29.8,121.8 34.6,121.8 36,120.4 J8.9
LOAD_CHKN: U3.1 U4.1 U5.1 | length 68.4
  Top Layer w0.254: U5.1 v1(47.7,43) ; U4.1 62.425,60.373 64.618,60.373 64.645,60.4 v1(67.4,60.4) 67.4,65.055 67.527,65.182 67.527,79.473 66.445,80.555 U3.1
  Inner Layer 2 w0.254: v1(67.4,43) 67.4,44.628 67.427,44.655 67.427,60.373 v1(67.4,60.4)
  Bottom Layer w0.254: v1(47.7,43) v1(67.4,43)
MIC_CLK: U1.2 U2.2 U5.5 | length 69.9
  Top Layer w0.254: U5.5 48.375,45 51.027,47.652 51.027,95.928 50.973,95.982 50.973,101.948 52.835,103.81 U1.2 ; v1(53.81,53.81) U2.2
  Bottom Layer w0.254: v1(50.996,53.81) v1(53.81,53.81)
MIC_DO: U1.6 U2.3 | length 51.9
  Top Layer w0.254: U2.3 52.544,52.54 52.544,96.644 52.587,96.687 52.587,98.687 52.63,98.73 U1.6
MISO: J7.5 U4.9 | length 47.5
  Top Layer w0.254: v1(55.9,69.5) 55.955,69.445 U4.9
  Inner Layer 2 w0.254: J7.5 46.7,40.7 46.7,49.9 49.5,52.7 v1(49.5,69.5)
  Bottom Layer w0.254: v1(49.5,69.5) v1(55.9,69.5)
MOSI: J7.7 U1.3 | length 78.9
  Top Layer w0.254: v1(52.3,102.5) 52.34,102.54 U1.3
  Inner Layer 2 w0.254: J7.7 46.1,42.1 46.1,50.225 48.846,52.971 48.846,101.346 50,102.5 v1(52.3,102.5)
NCHK_COM_A_C1: D_CAC1.C S_C1A.7 U3.12 | length 80.9
  Top Layer w0.254: v1(55.4,86) 55.5,86 55.865,85.635 U3.12
  Inner Layer 1 w0.254: v1(41.7,86) 78.5,86 v1(80.7,88.2) ; v1(82.013,111.887) 83.325,113.2 89.88,113.2 S_C1A.7
  Inner Layer 2 w0.254: D_CAC1.C 41.27,86.43 v1(41.7,86) ; v1(80.7,88.2) 81.038,88.538 81.038,110.913 v1(82.013,111.887)
NCHK_COM_A_C2: D_CAC2.C S_C2A.7 U3.14 | length 105.1
  Top Layer w0.254: v1(54.054,85.346) 56.305,83.095 U3.14
  Inner Layer 1 w0.254: v1(41.154,85.346) v1(54.054,85.346) 78.771,85.346 v1(81.162,87.738) ; v1(82.475,111.425) 83.596,112.546 109.226,112.546 S_C2A.7
  Inner Layer 2 w0.254: v1(41.154,85.346) 41.27,85.23 D_CAC2.C ; v1(81.162,87.738) 81.692,88.267 81.692,110.642 v1(82.475,111.425)
NCHK_COM_A_C3: D_CAC3.C S_C3A.7 U3.4 | length 135.7
  Top Layer w0.254: U3.4 62.425,84.527 65.827,84.527 v1(66,84.7)
  Inner Layer 1 w0.254: v1@40,84.692 79.042,84.692 v1(81.625,87.275) ; v1(82.938,110.962) 83.867,111.892 128.572,111.892 S_C3A.7
  Inner Layer 2 w0.254: v1(40,84.7) 40,71.27 D_CAC3.C ; v1(81.625,87.275) 82.346,87.996 82.346,110.371 v1(82.938,110.962)
NCHK_COM_A_C4: D_CAC4.C S_C4A.7 U3.6 | length 158.6
  Top Layer w0.254: U3.6 64.095,86.905 64.4,86.6 v1(64.5,86.6)
  Inner Layer 1 w0.254: v1(47.8,84.038) 79.313,84.038 v1(82.087,86.813) ; v1(83.4,110.5) 84.138,111.238 147.918,111.238 S_C4A.7
  Inner Layer 2 w0.254: D_CAC4.C 47.8,61.53 v1(47.8,84.038) ; v1(64.5,84) v1(64.5,86.6) ; v1(82.087,86.813) 83,87.725 83,110.1 v1(83.4,110.5)
NCHK_COM_B_C1: D_CBC1.C S_C1B.7 U4.12 | length 151.4
  Top Layer w0.254: v1(54.3,64.1) 54.3,65.4 54.535,65.635 U4.12
  Inner Layer 1 w0.254: v1(32.8,64.1) v1(54.3,64.1) 85.2,64.1 86.638,65.538 148.218,65.538 S_C1B.7
  Inner Layer 2 w0.254: D_CBC1.C 32.8,88.47 v1(32.8,64.1)
NCHK_COM_B_C2: D_CBC2.C S_C2B.7 U4.14 | length 124.2
  Top Layer w0.254: v1(55,64.754) 55,64.413 54.973,64.386 54.973,62.582 55.282,62.273 55.718,62.273 56.027,62.582 56.027,62.991 56.418,63.382 56.705,63.095 U4.14
  Inner Layer 1 w0.254: v1(30,64.754) v1(55,64.754) 84.929,64.754 86.367,66.192 128.872,66.192 S_C2B.7
  Inner Layer 2 w0.254: v1(30,64.754) 30,78.73 D_CBC2.C
NCHK_COM_B_C3: D_CBC3.C S_C3B.7 U4.4 | length 91.6
  Top Layer w0.254: U4.4 65.965,64.365 v1(67,65.4)
  Inner Layer 1 w0.254: v1@30.7,65.408 84.658,65.408 86.096,66.846 109.526,66.846 S_C3B.7
  Inner Layer 2 w0.254: v1(30.7,65.4) 30.8,65.5 30.8,69.53 D_CBC3.C
NCHK_COM_B_C4: D_CBC4.C S_C4B.7 U4.6 | length 69.3
  Top Layer w0.254: U4.6 64.095,66.905 v1(64.1,66.9)
  Inner Layer 1 w0.254: v1(31.8,66) v1@31.862,66.062 ; v1@31.9,66.1 v1@31.862,66.062 ; S_C4B.7 90.18,67.5 85.825,67.5 84.387,66.062 v1@31.862,66.062
  Inner Layer 2 w0.254: D_CBC4.C 31.27,65.67 31.6,66 v1(31.8,66) ; v1(64.1,66.1) v1(64.1,66.9)
NCHK_POS_A_C1: D_PAC1.C S_C1A.8 U3.11 | length 61.5
  Top Layer w0.254: v1(56,86.9) 56.005,86.905 U3.11
  Inner Layer 1 w0.254: v1@46.3,81.438 83.138,81.438 84.2,82.5 90.18,82.5 S_C1A.8
  Inner Layer 2 w0.254: D_PAC1.C 46.27,81.43 v1(46.3,81.46) ; v1(56,81.298) v1(56,86.9)
NCHK_POS_A_C2: D_PAC2.C S_C2A.8 U3.13 | length 78
  Top Layer w0.254: v1(54.8,86.6) 54.873,86.527 54.873,85.782 56.289,84.365 U3.13
  Inner Layer 1 w0.254: v1@45.6,82.092 82.867,82.092 83.929,83.154 109.526,83.154 S_C2A.8
  Inner Layer 2 w0.254: v1(45.6,82.1) 45.6,80.67 D_PAC2.C ; v1(54.2,82.1) 54.8,82.7 v1(54.8,86.6)
NCHK_POS_A_C3: D_PAC3.C S_C3A.8 U3.3 | length 103.1
  Top Layer w0.254: U3.3 64.105,83.095 v1(64.454,82.746)
  Inner Layer 1 w0.254: v1@45,82.746 v1(64.454,82.746) 82.596,82.746 83.658,83.808 128.872,83.808 S_C3A.8
  Inner Layer 2 w0.254: v1(45,82.8) 45,71.27 D_PAC3.C
NCHK_POS_A_C4: D_PAC4.C S_C4A.8 U3.5 | length 140.8
  Top Layer w0.254: U3.5 64.635,85.635 65.3,86.3 v1(65.3,86.6)
  Inner Layer 1 w0.254: v1(42.5,83.4) v1(65.3,83.4) 82.325,83.4 83.387,84.462 148.218,84.462 S_C4A.8
  Inner Layer 2 w0.254: D_PAC4.C 42.527,61.357 42.527,77.245 42.5,77.272 v1(42.5,83.4) ; v1(65.3,83.4) v1(65.3,86.6)
NCHK_POS_B_C1: D_PBC1.C S_C1B.8 U4.11 | length 172.7
  Top Layer w0.254: v1(53.6,63.5) 53.6,66.6 53.905,66.905 U4.11
  Inner Layer 1 w0.254: v1(37.662,63.462) 81.213,63.462 81.596,63.079 v1(81.787,62.887) ; v1(82.9,39.2) 83.608,38.492 148.188,38.492 S_C1B.8
  Inner Layer 2 w0.254: D_PBC1.C 37.7,88.57 37.7,63.5 v1(37.662,63.462) ; v1(81.787,62.887) 81.884,62.887 82.9,61.871 v1(82.9,39.2)
NCHK_POS_B_C2: D_PBC2.C S_C2B.8 U4.13 | length 141.8
  Top Layer w0.254: v1(55.5,62.8) 55.5,63.9 55.965,64.365 U4.13
  Inner Layer 1 w0.254: v1@35,62.808 80.942,62.808 81.133,62.616 v1(81.325,62.425) ; v1(82.438,38.738) 83.247,37.928 128.752,37.928 S_C2B.8
  Inner Layer 2 w0.254: v1(35,62.8) 35,78.73 D_PBC2.C ; v1(81.325,62.425) 82.246,61.504 82.246,38.929 v1(82.438,38.738)
NCHK_POS_B_C3: D_PBC3.C S_C3B.8 U4.3 | length 110
  Top Layer w0.254: U4.3 64.005,63.095 v1(65,62.1)
  Inner Layer 1 w0.254: v1(36.286,62.154) 80.671,62.154 v1(80.862,61.962) ; v1(81.975,38.275) 82.886,37.364 109.316,37.364 S_C3B.8
  Inner Layer 2 w0.254: D_PBC3.C 36.27,62.17 v1(36.286,62.154) ; v1(80.862,61.962) 81.592,61.233 81.592,38.658 81.784,38.467 v1(81.975,38.275)
NCHK_POS_B_C4: D_PBC4.C S_C4B.8 U4.5 | length 89.5
  Top Layer w0.254: U4.5 62.425,65.573 64.973,65.573 v1(66,66.6)
  Inner Layer 1 w0.254: v1(36.3,61.5) v1(66,61.5) v1(80.4,61.5) ; v1(81.513,37.813) 82.525,36.8 89.88,36.8 S_C4B.8
  Inner Layer 2 w0.254: D_PBC4.C 36.27,61.47 v1(36.3,61.5) ; v1(66,66.6) 66.1,66.5 v1@66.1,61.6 ; v1(80.4,61.5) 80.938,60.962 80.938,38.387 81.13,38.196 81.321,38.004 v1(81.513,37.813)
NEG_1: J_C1.3 S_C1A.14 S_C1B.14 | length 125.7
  Inner Layer 1 w0.254: S_C1A.14 102.422,107.962 v1@163.6,107.962 ; S_C1B.14 159.96,59.5 161.775,59.5 v1(162.987,60.713)
  Inner Layer 2 w0.254: v1(162.987,60.713) 163.179,60.904 163.37,61.096 163.562,61.287 v1(163.562,91.038) 163.6,91.076 v1(163.6,107.9)
  Bottom Layer w0.254: v1(163.562,91.038) 163.573,91.027 166.818,91.027 167.765,90.08 J_C1.3
NEG_2: J_C2.3 S_C2A.14 S_C2B.14 | length 123.6
  Inner Layer 1 w0.254: S_C2A.14 121.768,107.308 v1@162.9,107.308 ; S_C2B.14 140.614,60.154 161.504,60.154 v1(162.525,61.175)
  Inner Layer 2 w0.254: v1(162.525,61.175) 162.716,61.367 162.908,61.558 v1(162.908,80.092) 162.908,107.292 v1(162.9,107.3)
  Bottom Layer w0.254: v1(162.908,80.092) 162.92,80.08 J_C2.3
NEG_3: J_C3.3 S_C3A.14 S_C3B.14 | length 121.9
  Inner Layer 1 w0.254: S_C3B.14 121.268,60.808 161.233,60.808 v1(162.062,61.638) ; S_C3A.14 141.114,106.654 v1@162.3,106.654
  Inner Layer 2 w0.254: v1(162.062,61.638) 162.254,61.829 162.254,106.554 v1(162.3,106.6)
  Bottom Layer w0.254: v1(162.234,70.08) J_C3.3
NEG_4: J_C4.3 S_C4A.14 S_C4B.14 | length 121.3
  Inner Layer 1 w0.254: S_C4B.14 101.922,61.462 160.962,61.462 v1(161.6,62.1) ; S_C4A.14 160.46,106 v1@161.6,106
  Inner Layer 2 w0.254: v1(161.6,62.1) v1(161.6,105.9)
  Bottom Layer w0.254: v1@161.535,62.035 161.535,61.419 162.769,60.186 169.894,60.186 J_C4.3
NetD_CAC1_A: D_CAC1.A R5.1 | length 2.6
  Top Layer w0.254: R5.1 D_CAC1.A@39.135,89.595
NetD_CAC2_A: D_CAC2.A R13.1 | length 2.6
  Top Layer w0.254: R13.1 D_CAC2.A@39.135,79.595
NetD_CAC3_A: D_CAC3.A R7.1 | length 3.2
  Top Layer w0.254: D_CAC3.A 39.135,69.595 R7.1
NetD_CAC4_A: D_CAC4.A R15.1 | length 3.2
  Top Layer w0.254: D_CAC4.A 44.135,59.595 R15.1
NetD_CBC1_A: D_CBC1.A R6.1 | length 2.6
  Top Layer w0.254: R6.1 D_CBC1.A@29.135,89.595
NetD_CBC2_A: D_CBC2.A R14.1 | length 2.6
  Top Layer w0.254: R14.1 D_CBC2.A@29.135,79.595
NetD_CBC3_A: D_CBC3.A R8.1 | length 3.2
  Top Layer w0.254: D_CBC3.A 29.135,69.595 R8.1
NetD_CBC4_A: D_CBC4.A R16.1 | length 2.6
  Top Layer w0.254: R16.1 D_CBC4.A@29.135,59.595
NetD_PAC1_A: D_PAC1.A R1.1 | length 2.6
  Top Layer w0.254: R1.1 D_PAC1.A@44.135,89.595
NetD_PAC2_A: D_PAC2.A R9.1 | length 2.6
  Top Layer w0.254: R9.1 D_PAC2.A@44.135,79.595
NetD_PAC3_A: D_PAC3.A R3.1 | length 3.2
  Top Layer w0.254: D_PAC3.A 44.135,69.595 R3.1
NetD_PAC4_A: D_PAC4.A R11.1 | length 2.6
  Top Layer w0.254: R11.1 D_PAC4.A@39.135,59.695
NetD_PBC1_A: D_PBC1.A R2.1 | length 2.6
  Top Layer w0.254: R2.1 D_PBC1.A@34.135,89.595
NetD_PBC2_A: D_PBC2.A R10.1 | length 2.6
  Top Layer w0.254: R10.1 D_PBC2.A@34.135,79.595
NetD_PBC3_A: D_PBC3.A R4.1 | length 3.2
  Top Layer w0.254: D_PBC3.A 34.135,69.595 R4.1
NetD_PBC4_A: D_PBC4.A R12.1 | length 2.6
  Top Layer w0.254: R12.1 D_PBC4.A@34.135,59.595
NetJ_A_2: J_A.2 R23.1 | length 2.6
  Top Layer w0.254: J_A.2 R23.1@172.595,97.54
NetJ_B_2: J_B.2 R25.1 | length 2.6
  Top Layer w0.254: J_B.2 R25.1@172.595,47.54
NetJ_C1_2: J_C1.2 R22.1 | length 2.6
  Top Layer w0.254: J_C1.2 R22.1@172.595,87.54
NetJ_C2_2: J_C2.2 R24.1 | length 2.6
  Top Layer w0.254: J_C2.2 R24.1@172.595,77.54
NetJ_C3_2: J_C3.2 R28.1 | length 2.6
  Top Layer w0.254: J_C3.2 R28.1@172.595,67.54
NetJ_C4_2: J_C4.2 R29.1 | length 2.6
  Top Layer w0.254: J_C4.2@170.04,57.5 R29.1
NetR19_2: R19.2 U3.15 | length 4.2
  Top Layer w0.254: R19.2 54.76,81.825 U3.15
NetR21_2: R21.2 U4.15 | length 4.1
  Top Layer w0.254: R21.2 54.56,61.825 U4.15
OUT_A: J_A.1 S_C1A.9 S_C2A.9 S_C3A.9 S_C4A.9 | length 104.9
  Top Layer w0.254: S_C1A.9 103.3,77 121,77 ; S_C2A.9 121,79.3 121,77 ; S_C3A.9 141,79.3 141,77 ; S_C4A.9 161,79.3 161,77 ; J_A.1 166.5,95 165,93.5 165,79.5 162.5,77 161,77 ; 121,77 141,77 ; 141,77 161,77
OUT_B: J_B.1 S_C1B.9 S_C2B.9 S_C3B.9 S_C4B.9 | length 105.6
  Top Layer w0.254: S_C4B.9 105.2,29.1 164.5,29.1 170,34.6 J_B.1 ; 118.81,29.21 S_C3B.9 ; 138.81,29.11 S_C2B.9 ; 158.81,29.11 S_C1B.9
POS_1: J_C1.1 S_C1A.13 S_C1B.13 | length 124.2
  Inner Layer 1 w0.254: S_C1A.13 101.922,88.538 v1@164.3,88.538 ; S_C1B.13 160.16,44.3 163.8,44.3 v1(164.7,45.2)
  Inner Layer 2 w0.254: v1(164.3,88.5) 164.7,88.1 v1(164.7,45.2)
  Bottom Layer w0.254: v1(164.3,88.5) 167.8,85 J_C1.1
POS_2: J_C2.1 S_C2A.13 S_C2B.13 | length 124.7
  Inner Layer 1 w0.254: S_C2A.13 121.268,89.192 v1@165.6,89.192 ; S_C2B.13 140.814,43.646 164.071,43.646 v1(165.162,44.738)
  Inner Layer 2 w0.254: v1(165.162,44.738) 165.354,44.929 v1(165.354,75) 165.354,88.954 v1(165.6,89.2)
  Bottom Layer w0.254: v1(165.354,75) J_C2.1
POS_3: J_C3.1 S_C3A.13 S_C3B.13 | length 126.2
  Inner Layer 1 w0.254: S_C3B.13 121.468,42.992 164.342,42.992 v1(165.625,44.275) ; S_C3A.13 140.614,89.846 165.7,89.846 ; 165.746,89.8 v1(166.1,89.8)
  Inner Layer 2 w0.254: v1(165.625,44.275) 165.816,44.467 166.008,44.658 166.008,86.775 166.127,86.894 166.127,89.827 v1(166.1,89.8)
  Bottom Layer w0.254: v1(166,65) J_C3.1
POS_4: J_C4.1 S_C4A.13 S_C4B.13 | length 127.8
  Inner Layer 1 w0.254: S_C4B.13 102.122,42.338 164.613,42.338 v1(166.087,43.813) ; S_C4A.13 159.96,90.5 v1(166.6,90.5)
  Inner Layer 2 w0.254: v1(166.087,43.813) 166.279,44.004 166.47,44.196 166.662,44.387 166.662,90.438 v1(166.6,90.5)
  Bottom Layer w0.254: v1(166.7,55) J_C4.1
REL_A_CELL1: S_C1A.15 U1.17 | length 37.2
  Top Layer w0.254: U1.17 64.682,103.683 66.317,103.683 68.564,101.436 94.104,101.436 S_C1A.15
REL_A_CELL2: S_C2A.15 U1.15 | length 57.5
  Top Layer w0.254: U1.15 65.682,101.27 66.661,100.291 80.634,100.291 85.869,95.056 117.136,95.056 S_C2A.15
REL_A_CELL3: S_C3A.15 U1.13 | length 77.8
  Top Layer w0.254: U1.13 65.682,98.73 66.115,99.163 80.167,99.163 85.402,93.928 136.008,93.928 S_C3A.15
REL_A_CELL4: S_C4A.15 U1.11 | length 98.8
  Top Layer w0.254: U1.11 65.682,96.19 67.527,98.035 79.7,98.035 84.935,92.8 154.88,92.8 S_C4A.15
REL_B_CELL1: S_C1B.15 U2.17 | length 98.7
  Top Layer w0.254: U2.17 65.682,53.81 66.661,52.831 82.629,52.831 86.454,56.656 152.884,56.656 S_C1B.15
REL_B_CELL2: S_C2B.15 U2.15 | length 78
  Top Layer w0.254: U2.15 65.682,51.27 66.115,51.703 83.096,51.703 86.921,55.528 134.012,55.528 S_C2B.15
REL_B_CELL3: S_C3B.15 U2.13 | length 58.1
  Top Layer w0.254: U2.13 65.682,48.73 67.527,50.575 83.563,50.575 87.388,54.4 115.14,54.4 S_C3B.15
REL_B_CELL4: S_C4B.15 U2.11 | length 36.1
  Top Layer w0.254: U2.11 65.682,46.19 68.428,48.936 97.016,48.936 S_C4B.15
SCK: J7.4 J8.4 U5.4 | length 105.5
  Top Layer w0.254: J7.4 45,29 48,29 50.7,31.7 50.7,43.8 50,44.5 U5.4 45.2,44.5 45,44.7 v1(45,46)
  Inner Layer 2 w0.254: J8.4 48.327,110.673 48.327,53.023 45,49.696 v1(45,46)
SDI: R18.2 R20.2 U3.10 | length 39.4
  Top Layer w0.254: R18.2 40,108.273 39.362,107.635 39.362,106.8 40.162,106 47.5,106 47.66,105.84 47.667,105.84 49.4,104.107 49.4,102.4 ; v1@49.4,88.2 49.4,102.4 ; 49.4,102.546 49.4,102.4 ; R20.2@54.66,88.175 v1@56,88.175 ; v1(56,88.2) v1@56,88.175 ; U3.10 v1@56,88.175
  Bottom Layer w0.254: v1(49.5,88.2) 49.4,88.2 v1(56,88.2)
SDI_DS: J8.5 R18.1 | length 8.9
  Top Layer w0.15: R18.1 40,115.5 39,116.5 39,118 J8.5
SDO: R17.2 U2.6 | length 75.2
  Top Layer w0.254: R17.2 38,108.273 38.798,107.475 38.798,106.566 39.928,105.436 47.5,105.436 48.9,104.036 48.9,68.855 50,67.755 v1(50,48.76) ; v1(53.87,48.73) U2.6
  Bottom Layer w0.254: v1(50,48.76) 50.03,48.73 v1(53.87,48.73)
SDO_DS: J8.7 R17.1 | length 8.9
  Top Layer w0.15: R17.1 38,115.6 37.6,116 37.586,116 37,116.586 37,118 J8.7
STROBE: U1.7 U2.7 U5.10 | length 75.2
  Top Layer w0.254: v1(40.5,42.3) 41.2,43 U5.10 ; v1(52.1,42.4) 52.1,95.955 52.127,95.982 52.127,96.418 52.1,96.445 v1@52.1,97.452 ; 52.1,47.46 U2.7 ; v1(53.86,97.46) U1.7 U1.7@55.437,97.452
  Bottom Layer w0.254: v1(40.5,42.3) 40.8,42 51.7,42 v1(52.1,42.4) ; v1(52.06,97.46) v1(53.86,97.46)
VCC5V: C2.1 C3.1 C4.1 C5.1 C8.1 J7.2 J8.2 R1.2 R2.2 R3.2 R4.2 R5.2 R6.2 R7.2 R8.2 R9.2 R10.2 R11.2 R12.2 R13.2 R14.2 R15.2 R16.2 R26.1 R27.1 U1.5 U2.5 U3.16 U4.16 U5.3 | length 56.8
  Top Layer w0.254: R16.2 v1(32,57) ; R8.2 v1(32,67) ; R14.2 v1(32,77) ; R6.2@30.865,86.9 v1(32,86.9) ; v1(32,47) R27.1 ; v1(32,103) R26.1@33.55,103 ; R12.2 v1(37,57) ; R4.2 v1(37,67) ; R10.2 v1(37,77) ; R2.2@35.865,86.9 v1(37,86.9) ; R11.2 v1(42,57.1) ; R7.2 v1(42,67) ; R13.2 v1(42,77) ; R5.2@40.865,86.9 v1(42,86.9) ; R15.2 v1(47,57) ; R3.2 v1(47,67) ; R9.2 v1(47,77) ; R1.2@45.865,86.9 v1(47,86.9) ; U5.3 v1@47.5,44 ; v1(47.5,43.9) v1@47.6,43.9 ; v1@47.6,43.8 C8.1 ; C3.1@52.925,50.195 53.605,50.195 v1(53.8,50) U2.5 ; C2.1@52.925,100.195 53.605,100.195 v1(53.8,100) U1.5 ; C5.1 55.5,60.1 v1(55.955,60.555) U4.16 ; C4.1 55.5,80.1 v1(55.955,80.555) U3.16
  Bottom Layer w0.254: v1(44,47) v1(48,47) ; v1(44,49) v1(48,49) ; v1(47,72.5) v1(49.5,72.5) ; v1(47,74.5) v1(49.5,74.5) ; v1(47,75.5) v1(49.5,75.5) ; v1(47.5,91.5) v1(50,91.5) ; v1(47.5,93.1) v1(50,93.1) ; v1(47.5,94.5) v1(50,94.5) ; v1@55.9,60.5 v1(55.955,60.555)
pads on no net: J7.1 J7.10 J7.11 J8.1 J8.10 J8.11 S_C1A.5 S_C1A.6 S_C1A.11 S_C1A.12 S_C1B.5 S_C1B.6 S_C1B.11 S_C1B.12 S_C2A.5 S_C2A.6 S_C2A.11 S_C2A.12 S_C2B.5 S_C2B.6 S_C2B.11 S_C2B.12 S_C3A.5 S_C3A.6 S_C3A.11 S_C3A.12 S_C3B.5 S_C3B.6 S_C3B.11 S_C3B.12 S_C4A.5 S_C4A.6 S_C4A.11 S_C4A.12 S_C4B.5 S_C4B.6 S_C4B.11 S_C4B.12 U3.7 U4.7

## Polygon pours and split planes (outlines as drawn)
GND on Inner Layer 1 "Inner Layer-GNDR" (solid, remove dead copper, pour order 28): 185,25 185,125 80,125 80,25
GND on Inner Layer 1 "Inner Layer 1-GND" (solid, remove dead copper, pour order 24): 69,54 69,48 86,48 90,44 175,44 177,46 177,99 170,106 90,106 87,103 69,103 69,97 79,97 85,91 86,90 92,90 166,90 168,88 168,63 166,61 165,60 90,60 88,60 82,54 68,54
GND on Inner Layer 1 "Inner Layer 1-GND" (solid, remove dead copper, pour order 23): 25,25 25,125 70,125 70,25
GND on Inner Layer 2 "Inner Layer2-GNDR" (solid, remove dead copper, pour order 29): 185,25 185,125 80,125 80,25
VCC5V on Inner Layer 2 "Inner Layer 2-VCC5V" (solid, remove dead copper, pour order 22): 25,25 25,125 70,125 70,25
GND on Top Layer "Top Layer-GNDR" (solid, remove dead copper, pour order 30): 185,25 185,125 80,125 80,25
GND on Top Layer "Top Layer-GND" (solid, remove dead copper, pour order 25): 25,25 70,25 70,125 25,125
GND on Bottom Layer "Bottom Layer-GNDR" (solid, remove dead copper, pour order 27): 185,125 80,125 80,25 185,25
GND on Bottom Layer "Bottom Layer-GND" (solid, remove dead copper, pour order 26): 25,25 70,25 70,125 25,125

## Keep-outs
Keep-Out Layer:
  the board outline again, w0.6